# EAGLE board Artemis_Global_Tracker-Panel (EAGLE 9.5.2), part 1 of 5
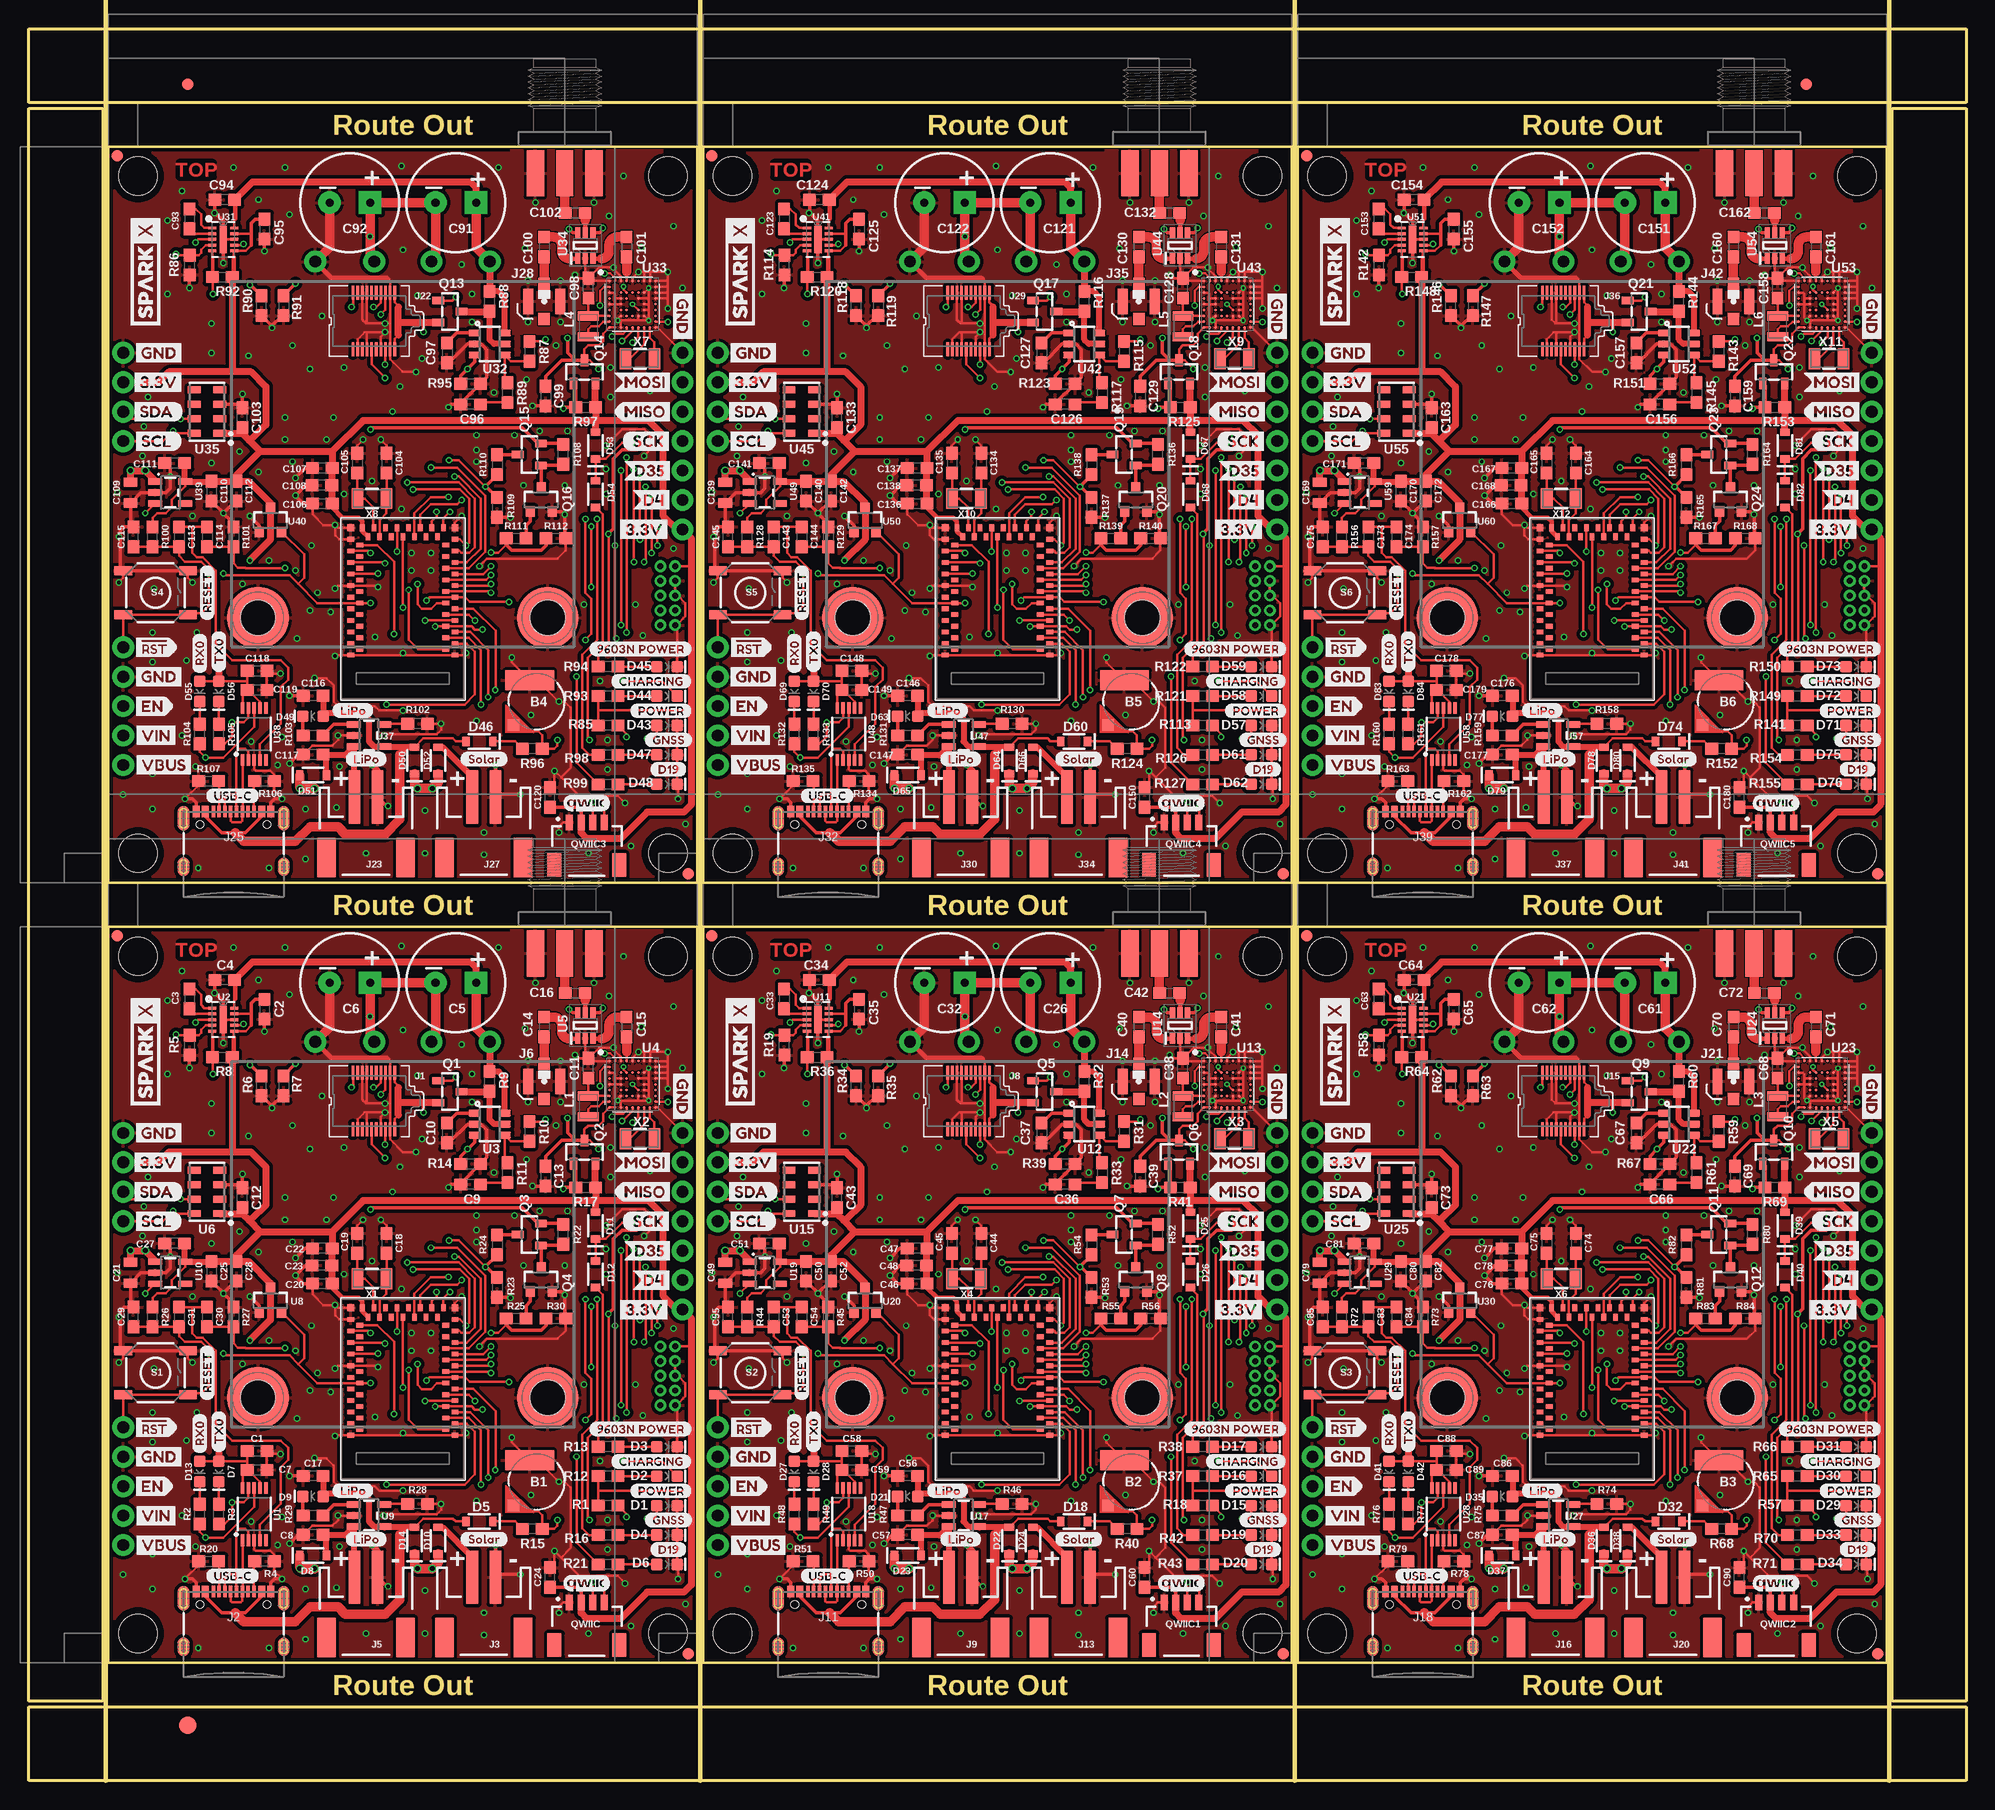
[diagram p0: board, top side]
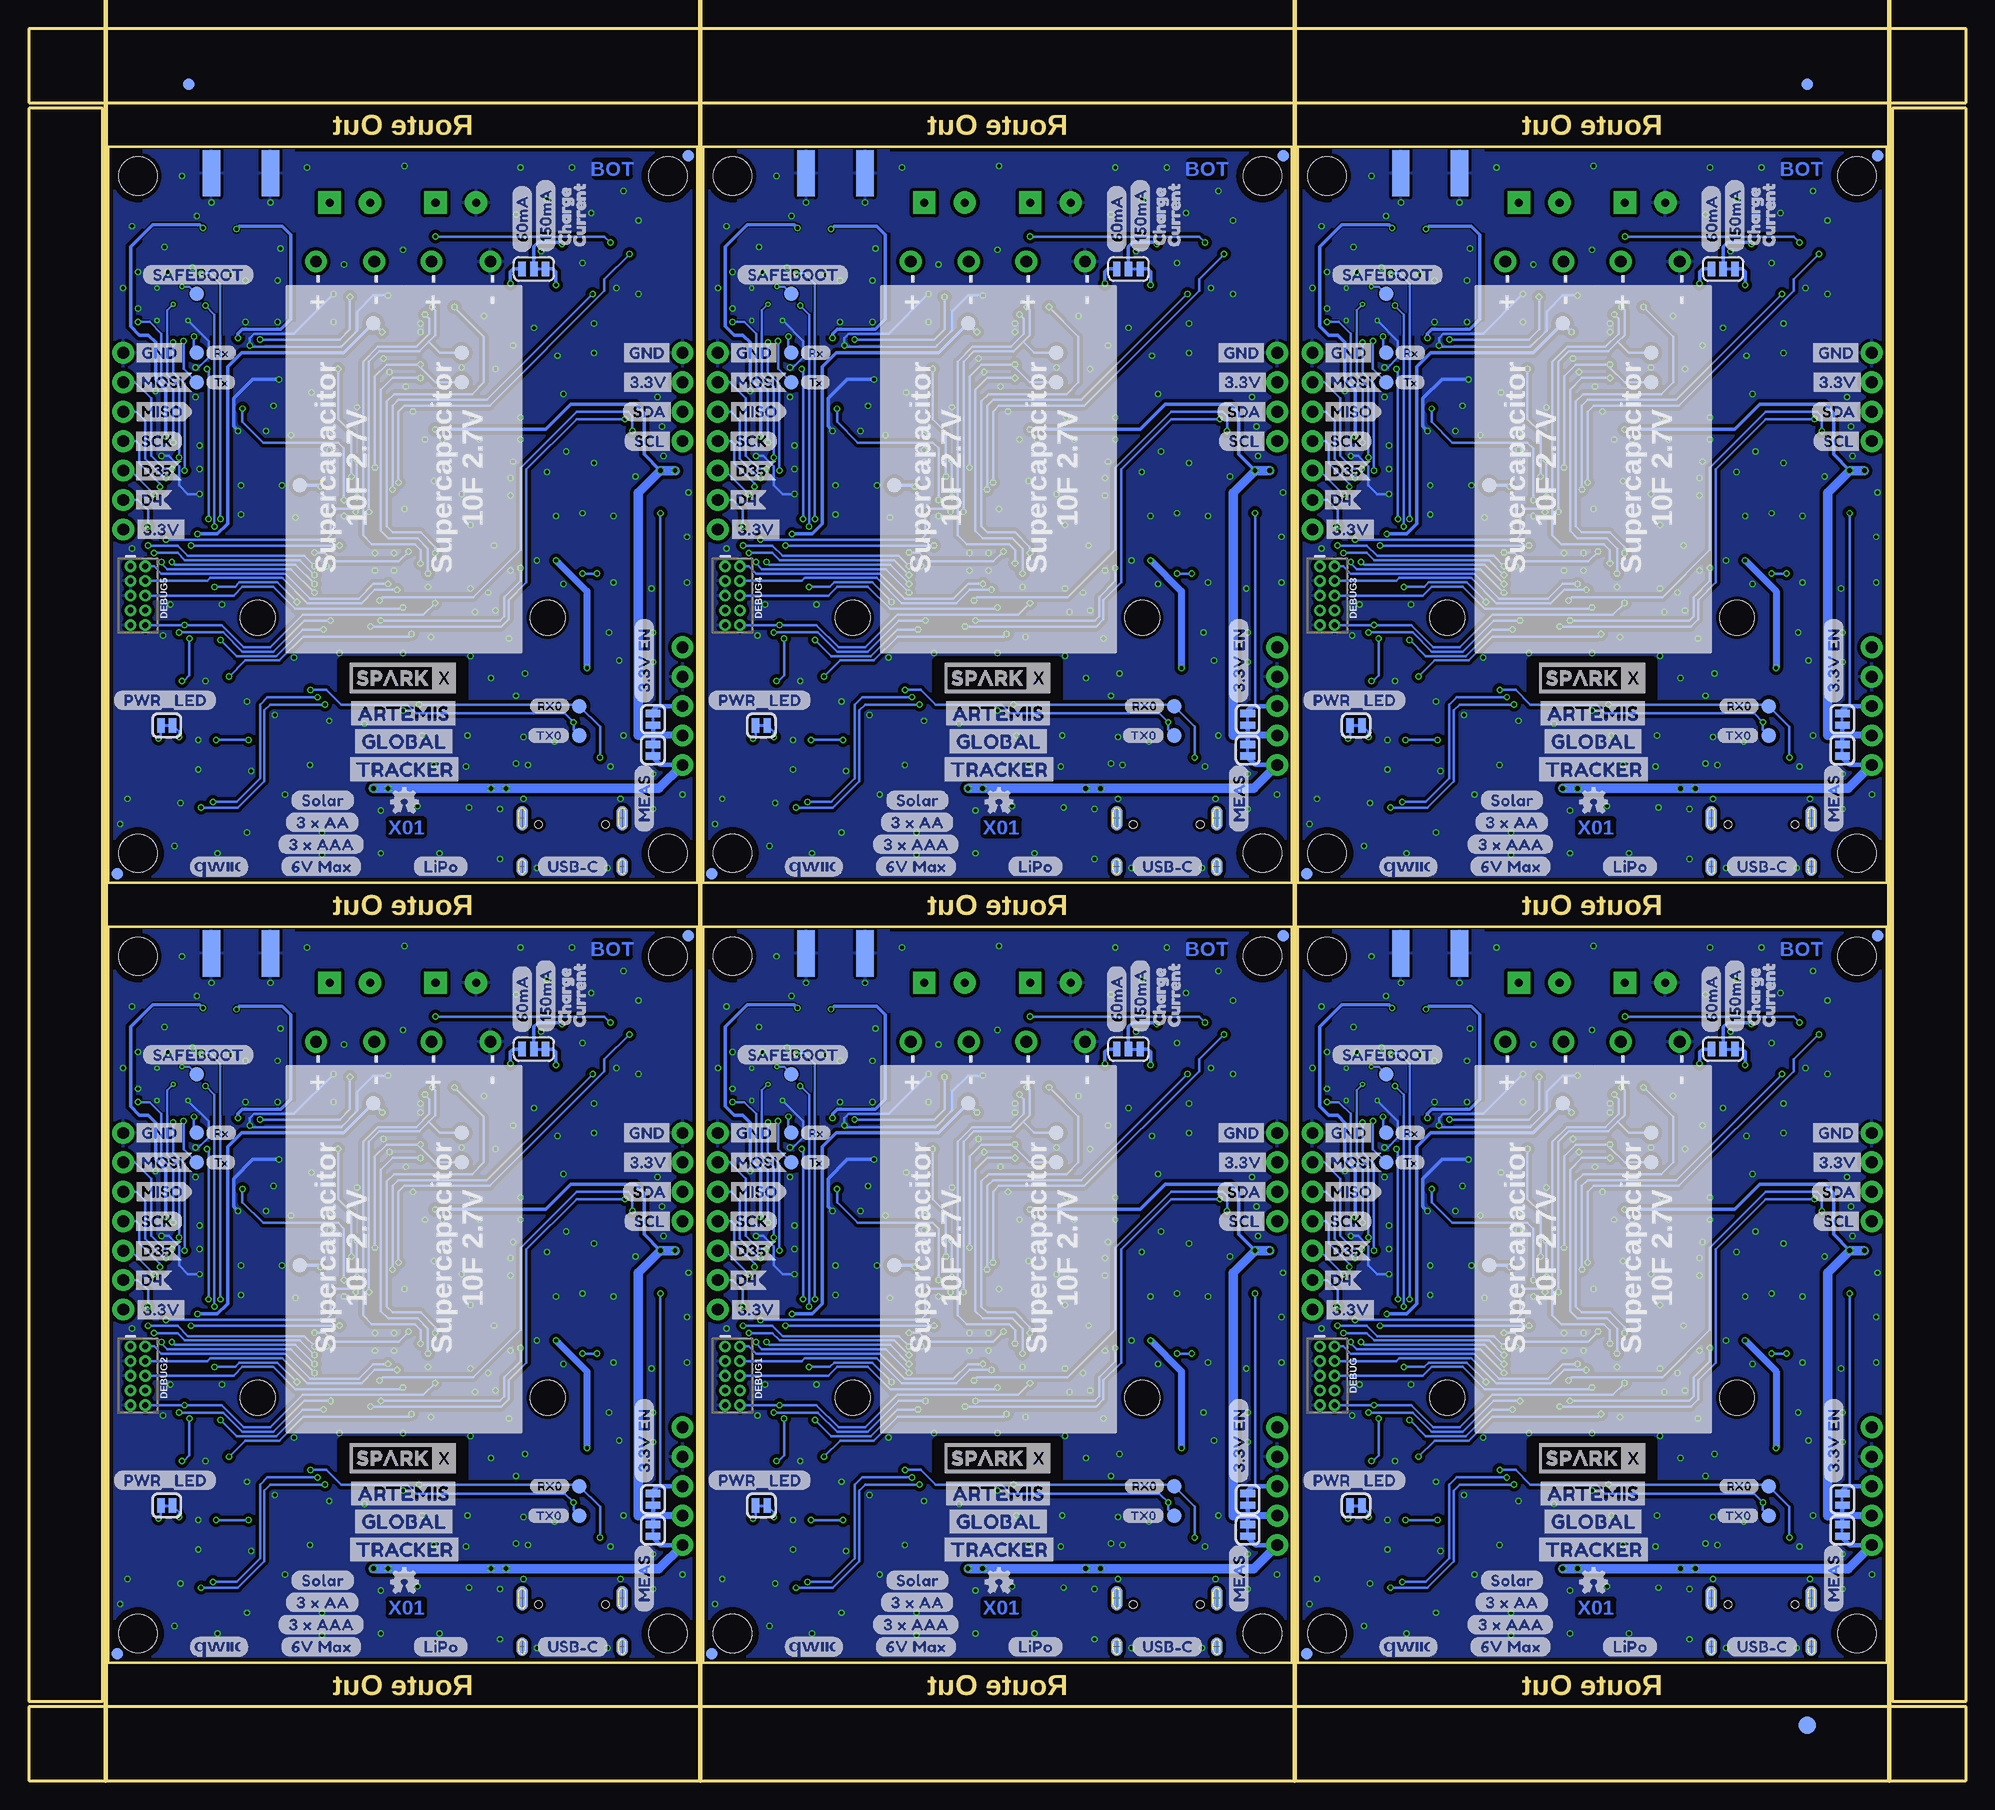
[diagram p1: board, bottom side, seen from below]

Size 167.13 x 151.13 mm. Coordinates in mm from the lower left corner, seen from the top.
Outline: 6.86,10.16 6.86,73.66 57.66,73.66 57.66,10.16 6.86,10.16
Outline: 58.17,10.16 58.17,73.66 108.97,73.66 108.97,10.16 58.17,10.16
Outline: 109.47,10.16 109.47,73.66 160.27,73.66 160.27,10.16 109.47,10.16
Outline: 6.86,77.47 6.86,140.97 57.66,140.97 57.66,77.47 6.86,77.47
Outline: 58.17,77.47 58.17,140.97 108.97,140.97 108.97,77.47 58.17,77.47
Outline: 109.47,77.47 109.47,140.97 160.27,140.97 160.27,77.47 109.47,77.47
Outline: 0,6.35 167.13,6.35 167.13,0 0,0 0,6.35
Outline: 160.78,144.27 167.13,144.27 167.13,6.86 160.78,6.86 160.78,144.27
Outline: 0,151.13 167.13,151.13 167.13,144.78 0,144.78 0,151.13
Outline: 0,144.27 6.35,144.27 6.35,6.86 0,6.86 0,144.27
Copper layers (1*16): Top 0.035mm / dielectric 1.5mm / Bottom 0.035mm
Design rules "Artemis_Global_Tracker": minimum track width 4mil, minimum drill 6mil, track to track 4mil, track to pad 4mil, pad to pad 4mil, via to via 4mil, smd to smd 4mil, copper to edge 4mil, drill to drill 4mil, minimum pad ring 5mil, minimum via ring 5mil, stop-mask expansion 4mil, vias tented up to drill 25mil, thermal gap 10mil
Net classes: 1 3.3V: width 0.203 mm
tRestrict: area 27.1,26.1 to 37.5,29.3; area 78.4,26.1 to 88.8,29.3; area 129.7,26.1 to 140.1,29.3; area 27.1,93.4 to 37.5,96.6; area 78.4,93.4 to 88.8,96.6; area 129.7,93.4 to 140.1,96.6
bRestrict: area 27.1,26.1 to 37.5,29.3; area 78.4,26.1 to 88.8,29.3; area 129.7,26.1 to 140.1,29.3; area 27.1,93.4 to 37.5,96.6; area 78.4,93.4 to 88.8,96.6; area 129.7,93.4 to 140.1,96.6
Milling: 4 lines

## Footprints (pad centres in the part's own frame; a part is rotated, then mirrored left to right if it is on the bottom)
SMT-JUMPER_2_NC_TRACE_SILK = smd 0.635 x 1.27: 1 -0.508,0; 2 0.508,0
PAD.03X.05 = smd 1.27 x 1.27: P$1 0,0
1X01_NO_SILK = drill 1.016 pad 1.88: 1 0,0
ML414H_IV01E = smd 1 x 1: + 2.022,2.032 | smd 4.2 x 1.7: - 0.6,-1.85
0603 = smd 1.1 x 1: 1 -0.85,0; 2 0.85,0
CPOL-RADIAL-1F-2.7V = drill 0.7 pad 1.93 square: + 1.75,0 | drill 0.7 pad 1.93: - -1.75,0
0805 = smd 0.8 x 1.2: 1 -0.9,0; 2 0.9,0
LED-0603 = smd 1 x 1: A -0.877,0; C 0.877,0
SOD-323 = smd 0.63 x 0.83: A 1.15,0; C -1.15,0
2X5-PTH-1.27MM-NO_SILK = drill 0.508 pad 1: 1 -2.54,-0.635; 2 -2.54,0.635; 3 -1.27,-0.635; 4 -1.27,0.635; 5 0,-0.635; 6 0,0.635; 7 1.27,-0.635; 8 1.27,0.635; 9 2.54,-0.635; 10 2.54,0.635
FIDUCIAL-1X2 = smd 1 x 1: 1 0,0
FIDUCIAL-1.5X3 = smd 1.5 x 1.5: 1 0,0
1X04_NO_SILK = drill 1.016 pad 1.88: 1 0,0; 2 2.54,0; 3 5.08,0; 4 7.62,0
IRIDIUM_9603N = smd 0.23 x 1.2: 1 11.8,28.035; 2 11.8,23.165; 3 11.4,28.035; 4 11.4,23.165; 5 11,28.035; 6 11,23.165; 7 10.6,28.035; 8 10.6,23.165; 9 10.2,28.035; 10 10.2,23.165; 11 9.8,28.035; 12 9.8,23.165; 13 9.4,28.035; 14 9.4,23.165; 15 9,28.035; 16 9,23.165; 17 8.6,28.035; 18 8.6,23.165; 19 8.2,28.035; 20 8.2,23.165 | smd 5.3 x 5.3: HOLE1 0,0; HOLE2 25,0 | hole 3: 0,0; 25,0
USB-C-16P = smd 0.3 x 1: A5 -1.25,-0.34; A6 -0.25,-0.34; A7 0.25,-0.34; A8 1.25,-0.34; B5 1.75,-0.34; B6 0.75,-0.34; B7 -0.75,-0.34; B8 -1.75,-0.34 | smd 0.6 x 1: GND -3.225,-0.34; GND2 3.225,-0.34; VBUS1 -2.45,-0.34; VBUS2 2.45,-0.34 | smd 1 x 2.1: SHLD1 -4.32,-0.915; SHLD2 4.32,-0.915 | smd 1 x 2.1 bottom: SHLD3 -4.32,-0.915; SHLD4 4.32,-0.915 | smd 1 x 1.6: SHLD5 -4.32,-5.095; SHLD8 4.32,-5.095 | smd 1 x 1.6 bottom: SHLD6 -4.32,-5.095; SHLD7 4.32,-5.095 | hole 0.65: -2.89,-1.445; 2.89,-1.445
JST-2-SMD = smd 1 x 4.6: 1 -1,-3.7; 2 1,-3.7 | smd 1.6 x 3.4: NC1 -3.4,1.5; NC2 3.4,1.5
1X02_NO_SILK = drill 1.016 pad 1.88: 1 0,0; 2 2.54,0
U.FL = smd 2.2 x 0.85: 1 0,1.375; 2 0,-1.375 | smd 1.05 x 1: FEED 1.525,0; NC -1.525,0
SMA-EDGE = smd 1.5 x 4: GND@0 -2.54,0; GND@1 2.54,0; SIG 0,0 | smd 1.5 x 4 bottom: GND@2 -2.54,0; GND@3 2.54,0
SMT-JUMPER_3_1-NC_TRACE_SILK = smd 0.635 x 1.27: 1 -1.016,0; 2 0,0; 3 1.016,0
STAND-OFF = hole 3.302: 0,0
0806 = smd 0.8 x 1.8: 1 -0.9,0; 2 0.9,0
SOT23-R = smd 0.635 x 1.016: 1 -0.95,-1; 2 0.95,-1; 3 0,1
SOT23-3 = smd 0.8 x 0.9: 1 -0.95,-1; 2 0.95,-1; 3 0,1.1
JST04_1MM_RA = smd 0.6 x 1.35: 1 -1.5,0; 2 -0.5,0; 3 0.5,0; 4 1.5,0 | smd 1.2 x 2: NC1 2.8,-3.675; NC2 -2.8,-3.675
TACTILE_SWITCH_SMD_5.2MM = smd 1.524 x 0.762: 1 -2.794,1.905; 2 2.794,1.905; 3 -2.794,-1.905; 4 2.794,-1.905
1X07_NO_SILK = drill 1.016 pad 1.88: 1 0,0; 2 2.54,0; 3 5.08,0; 4 7.62,0; 5 10.16,0; 6 12.7,0; 7 15.24,0
MSOP10 = smd 1 x 0.3: 1 -2.25,1; 2 -2.25,0.5; 3 -2.25,0; 4 -2.25,-0.5; 5 -2.25,-1; 6 2.25,-1; 7 2.25,-0.5; 8 2.25,0; 9 2.25,0.5; 10 2.25,1
DFN300X200-10L = smd 0.711 x 0.254: 1 -0.94,0.991; 2 -0.94,0.508; 3 -0.94,0; 4 -0.94,-0.508; 5 -0.94,-0.991; 6 0.94,-0.991; 7 0.94,-0.508; 8 0.94,0; 9 0.94,0.508; 10 0.94,0.991 | smd 0.635 x 2.388: 11 0,0
TSOT6 = smd 0.6 x 1.05: 1 -0.95,-1.3; 2 0,-1.3; 3 0.95,-1.3; 4 0.95,1.3; 5 0,1.3; 6 -0.95,1.3
UBLOX_ZOE_M8-0-10 = smd 0.25 x 0.25: 1 -1.996,2.004; 2 -1.496,2.004; 3 -0.996,2.004; 4 -0.496,2.004; 5 0.004,2.004; 6 0.504,2.004; 7 1.004,2.004; 8 1.504,2.004; 9 2.004,2.004; 10 2.004,1.504; 11 2.004,1.004; 12 2.004,0.504; 13 2.004,0.004; 14 2.004,-0.496; 15 2.004,-0.996; 16 2.004,-1.496; 17 2.004,-1.996; 18 1.504,-1.996; 19 1.004,-1.996; 20 0.504,-1.996; 21 0.004,-1.996; 22 -0.496,-1.996; 23 -0.996,-1.996; 24 -1.496,-1.996; 25 -1.996,-1.996; 26 -1.996,-1.496; 27 -1.996,-0.996; 28 -1.996,-0.496; 29 -1.996,0.004; 30 -1.996,0.504; 31 -1.996,1.004; 32 -1.996,1.504; 33 -0.996,1.004; 34 -0.496,1.004; 35 0.004,1.004; 36 0.504,1.004; 37 1.004,1.004; 38 1.004,0.004; 39 1.004,-0.496; 40 1.004,-0.996; 41 0.504,-0.996; 42 0.004,-0.996; 43 -0.496,-0.996; 44 -0.996,-0.996; 45 -0.996,-0.496; 46 -0.996,0.004; 47 -0.996,0.504; 48 -0.496,0.504; 49 0.504,0.504; 50 0.504,-0.496; 51 -0.496,-0.496
SOT65P220X100-6N = smd 0.95 x 0.45: 1 -1.1,0.65; 2 -1.1,0; 3 -1.1,-0.65; 4 1.1,-0.65; 5 1.1,0; 6 1.1,0.65
MS8607-02BA01 = smd 1.1 x 0.6: 1 -1.1,1.875; 2 -1.1,0.625; 3 -1.1,-0.625; 4 -1.1,-1.875; 5 1.1,-1.875; 6 1.1,-0.625; 7 1.1,0.625; 8 1.1,1.875
ARTEMIS_FP = smd 0.4 x 0.6: AD16 -4,-3.7; BOOT 1.5,4.5; D0 0.5,-4.5; D1 -0.5,-4.5; D2 -1,-3.7; D3 2,-3.7; D7 -1.5,4.5; D8 -0.5,4.5; D9 2,3.7; D10 1,3.7; D14 -5,3.7; D17 -3.5,-4.5; D36 2.5,-4.5; D38 3,-3.7; D40 2.5,4.5; D41 -2.5,-4.5; GND@1 4.5,4.5; GND@39 -5.5,-4.5; GND@47 -1.5,-4.5; GND@59 4.5,-4.5; RXI-0 3.5,4.5; SWDCK 4,3.7; SWDIO 0,3.7; TXO-0 0.5,4.5; ~AD31 -3,-3.7; ~AD35 -2,3.7; ~D4 -2.5,4.5; ~D5 -1,3.7; ~D18 -4.5,-4.5; ~D19 -5,-3.7; ~D22 -3.5,4.5; ~D23 -4,3.7; ~D24 -3,3.7; ~D27 -4.5,4.5; ~D28 -5.5,4.5; ~D37 3.5,-4.5; ~D39 3,3.7; ~D42 1.5,-4.5; ~D43 1,-3.7; ~D44 4,-3.7; ~D45 -2,-3.7; ~RST 0,-3.7 | smd 0.6 x 0.4: AD34 -6.5,-0.5; D15 -6.5,0.5; VDD@36 -5.7,-3; VDD@37 -6.5,-3.5; XI -6.5,-2.5; XO -5.7,-2; ~AD11 -5.7,-1; ~AD12 -5.7,2; ~AD13 -5.7,1; ~AD29 -6.5,-1.5; ~AD32 -5.7,3; ~AD33/SWO -5.7,0; ~D6 -6.5,3.5; ~D25 -6.5,2.5; ~D26 -6.5,1.5 | smd 0.6 x 0.6: GND@22 -6.5,4.5; GND@38 -6.5,-4.5
SSOP3 = smd 0.8 x 0.9: 1 -0.95,-1; 2 0.95,-1; 3 0,1.1
SOT23-5 = smd 0.55 x 1.2: 1 -0.95,-1.3; 2 0,-1.3; 3 0.95,-1.3; 4 0.95,1.3; 5 -0.95,1.3
CRYSTAL-SMD-3.2X1.5MM = smd 1 x 1.8: P$1 -1.25,0; P$2 1.25,0

## Placement (x,y rotation side)
3V3EN  JUMPER-SMT_2_NC_TRACE_SILK  [SMT-JUMPER_2_NC_TRACE_SILK]  10.67,24.26 90 bottom
3V3EN1  JUMPER-SMT_2_NC_TRACE_SILK  [SMT-JUMPER_2_NC_TRACE_SILK]  61.98,24.26 90 bottom
3V3EN2  JUMPER-SMT_2_NC_TRACE_SILK  [SMT-JUMPER_2_NC_TRACE_SILK]  113.28,24.26 90 bottom
3V3EN3  JUMPER-SMT_2_NC_TRACE_SILK  [SMT-JUMPER_2_NC_TRACE_SILK]  10.67,91.57 90 bottom
3V3EN4  JUMPER-SMT_2_NC_TRACE_SILK  [SMT-JUMPER_2_NC_TRACE_SILK]  61.98,91.57 90 bottom
3V3EN5  JUMPER-SMT_2_NC_TRACE_SILK  [SMT-JUMPER_2_NC_TRACE_SILK]  113.28,91.57 90 bottom
5V1  TEST-POINT3X5  [PAD.03X.05]  86.11,58.42 0 bottom
5V2  TEST-POINT3X5  [PAD.03X.05]  137.41,58.42 0 bottom
5V3  TEST-POINT3X5  [PAD.03X.05]  34.8,58.42 0 bottom
5V4  TEST-POINT3X5  [PAD.03X.05]  34.8,125.73 0 bottom
5V5  TEST-POINT3X5  [PAD.03X.05]  86.11,125.73 0 bottom
5V6  TEST-POINT3X5  [PAD.03X.05]  137.41,125.73 0 bottom
!RESET  [1X01_NO_SILK]  8.13,30.48 0 top
!RESET1  [1X01_NO_SILK]  59.44,30.48 0 top
!RESET2  [1X01_NO_SILK]  110.74,30.48 0 top
!RESET3  [1X01_NO_SILK]  8.13,97.79 0 top
!RESET4  [1X01_NO_SILK]  59.44,97.79 0 top
!RESET5  [1X01_NO_SILK]  110.74,97.79 0 top
B1  ML414H_IV01E_BATTERY  [ML414H_IV01E]  43.81,25.78 180 top
B2  ML414H_IV01E_BATTERY  [ML414H_IV01E]  95.12,25.78 180 top
B3  ML414H_IV01E_BATTERY  [ML414H_IV01E]  146.43,25.78 180 top
B4  ML414H_IV01E_BATTERY  [ML414H_IV01E]  43.81,93.09 180 top
B5  ML414H_IV01E_BATTERY  [ML414H_IV01E]  95.12,93.09 180 top
B6  ML414H_IV01E_BATTERY  [ML414H_IV01E]  146.43,93.09 180 top
C1  10nF  [0603]  19.68,28.45 0 top
C2  2.2uF  [0603]  20.32,66.55 270 top
C3  1.0uF  [0603]  13.84,67.44 270 top
C4  0.22uF  [0603]  16.89,69.09 180 top
C5  1F 2.7V  [CPOL-RADIAL-1F-2.7V]  36.83,68.83 0 top
C6  1F 2.7V  [CPOL-RADIAL-1F-2.7V]  27.69,68.83 0 top
C7  0.1uF  [0603]  19.68,26.8 0 top
C8  4.7uF  [0603]  24.51,21.21 180 top
C9  10nF  [0603]  38.1,51.44 180 top
C10  1.0uF  [0603]  36.07,55.88 270 top
C11  4.7uF  [0603]  48.26,61.47 90 top
C12  0.22uF  [0603]  18.41,50.29 90 top
C13  0.1uF  [0603]  44.58,52.15 270 top
C14  100pF  [0603]  44.45,65.02 270 top
C15  100pF  [0603]  51.56,65.02 270 top
C16  100pF  [0603]  47.12,67.94 0 top
C17  4.7uF  [0603]  24.51,26.29 180 top
C18  15pF  [0603]  30.86,46.36 270 top
C19  15pF  [0603]  28.32,46.36 270 top
C20  0.1uF  [0603]  25.32,42.88 0 top
C21  22uF  [0805]  8.76,43.81 270 top
C22  10uF  [0603]  25.32,45.92 180 top
C23  1.0uF  [0603]  25.27,44.45 180 top
C24  1.0uF  [0603]  44.96,17.53 90 top
C25  22uF  [0603]  15.75,43.94 270 top
C26  1F 2.7V  [CPOL-RADIAL-1F-2.7V]  88.14,68.83 0 top
C27  1.0uF  [0603]  12.57,46.36 180 top
C28  0.1uF  [0603]  17.91,43.94 270 top
C29  1nF  [0603]  9.02,40 90 top
C30  0.1uF  [0603]  15.37,40 270 top
C31  0.1uF  [0603]  12.95,40 270 top
C32  1F 2.7V  [CPOL-RADIAL-1F-2.7V]  78.99,68.83 0 top
C33  1.0uF  [0603]  65.15,67.44 270 top
C34  0.22uF  [0603]  68.2,69.09 180 top
C35  2.2uF  [0603]  71.63,66.55 270 top
C36  10nF  [0603]  89.41,51.44 180 top
C37  1.0uF  [0603]  87.38,55.88 270 top
C38  4.7uF  [0603]  99.57,61.47 90 top
C39  0.1uF  [0603]  95.89,52.15 270 top
C40  100pF  [0603]  95.76,65.02 270 top
C41  100pF  [0603]  102.87,65.02 270 top
C42  100pF  [0603]  98.42,67.94 0 top
C43  0.22uF  [0603]  69.72,50.29 90 top
C44  15pF  [0603]  82.17,46.36 270 top
C45  15pF  [0603]  79.63,46.36 270 top
C46  0.1uF  [0603]  76.63,42.88 0 top
C47  10uF  [0603]  76.63,45.92 180 top
C48  1.0uF  [0603]  76.58,44.45 180 top
C49  22uF  [0805]  60.07,43.81 270 top
C50  22uF  [0603]  67.06,43.94 270 top
C51  1.0uF  [0603]  63.88,46.36 180 top
C52  0.1uF  [0603]  69.22,43.94 270 top
C53  0.1uF  [0603]  64.26,40 270 top
C54  0.1uF  [0603]  66.67,40 270 top
C55  1nF  [0603]  60.32,40 90 top
C56  4.7uF  [0603]  75.82,26.29 180 top
C57  4.7uF  [0603]  75.82,21.21 180 top
C58  10nF  [0603]  70.99,28.45 0 top
C59  0.1uF  [0603]  70.99,26.8 0 top
C60  1.0uF  [0603]  96.27,17.53 90 top
C61  1F 2.7V  [CPOL-RADIAL-1F-2.7V]  139.45,68.83 0 top
C62  1F 2.7V  [CPOL-RADIAL-1F-2.7V]  130.3,68.83 0 top
C63  1.0uF  [0603]  116.46,67.44 270 top
C64  0.22uF  [0603]  119.51,69.09 180 top
C65  2.2uF  [0603]  122.94,66.55 270 top
C66  10nF  [0603]  140.72,51.44 180 top
C67  1.0uF  [0603]  138.68,55.88 270 top
C68  4.7uF  [0603]  150.88,61.47 90 top
C69  0.1uF  [0603]  147.19,52.15 270 top
C70  100pF  [0603]  147.07,65.02 270 top
C71  100pF  [0603]  154.18,65.02 270 top
C72  100pF  [0603]  149.73,67.94 0 top
C73  0.22uF  [0603]  121.03,50.29 90 top
C74  15pF  [0603]  133.48,46.36 270 top
C75  15pF  [0603]  130.94,46.36 270 top
C76  0.1uF  [0603]  127.94,42.88 0 top
C77  10uF  [0603]  127.94,45.92 180 top
C78  1.0uF  [0603]  127.89,44.45 180 top
C79  22uF  [0805]  111.38,43.81 270 top
C80  22uF  [0603]  118.36,43.94 270 top
C81  1.0uF  [0603]  115.19,46.36 180 top
C82  0.1uF  [0603]  120.52,43.94 270 top
C83  0.1uF  [0603]  115.57,40 270 top
C84  0.1uF  [0603]  117.98,40 270 top
C85  1nF  [0603]  111.63,40 90 top
C86  4.7uF  [0603]  127.13,26.29 180 top
C87  4.7uF  [0603]  127.13,21.21 180 top
C88  10nF  [0603]  122.3,28.45 0 top
C89  0.1uF  [0603]  122.3,26.8 0 top
C90  1.0uF  [0603]  147.57,17.53 90 top
C91  1F 2.7V  [CPOL-RADIAL-1F-2.7V]  36.83,136.14 0 top
C92  1F 2.7V  [CPOL-RADIAL-1F-2.7V]  27.69,136.14 0 top
C93  1.0uF  [0603]  13.84,134.75 270 top
C94  0.22uF  [0603]  16.89,136.4 180 top
C95  2.2uF  [0603]  20.32,133.86 270 top
C96  10nF  [0603]  38.1,118.74 180 top
C97  1.0uF  [0603]  36.07,123.19 270 top
C98  4.7uF  [0603]  48.26,128.78 90 top
C99  0.1uF  [0603]  44.58,119.46 270 top
C100  100pF  [0603]  44.45,132.33 270 top
C101  100pF  [0603]  51.56,132.33 270 top
C102  100pF  [0603]  47.12,135.25 0 top
C103  0.22uF  [0603]  18.41,117.6 90 top
C104  15pF  [0603]  30.86,113.66 270 top
C105  15pF  [0603]  28.32,113.66 270 top
C106  0.1uF  [0603]  25.32,110.19 0 top
C107  10uF  [0603]  25.32,113.23 180 top
C108  1.0uF  [0603]  25.27,111.76 180 top
C109  22uF  [0805]  8.76,111.12 270 top
C110  22uF  [0603]  15.75,111.25 270 top
C111  1.0uF  [0603]  12.57,113.66 180 top
C112  0.1uF  [0603]  17.91,111.25 270 top
C113  0.1uF  [0603]  12.95,107.31 270 top
C114  0.1uF  [0603]  15.37,107.31 270 top
C115  1nF  [0603]  9.02,107.31 90 top
C116  4.7uF  [0603]  24.51,93.6 180 top
C117  4.7uF  [0603]  24.51,88.52 180 top
C118  10nF  [0603]  19.68,95.76 0 top
C119  0.1uF  [0603]  19.68,94.11 0 top
C120  1.0uF  [0603]  44.96,84.84 90 top
C121  1F 2.7V  [CPOL-RADIAL-1F-2.7V]  88.14,136.14 0 top
C122  1F 2.7V  [CPOL-RADIAL-1F-2.7V]  78.99,136.14 0 top
C123  1.0uF  [0603]  65.15,134.75 270 top
C124  0.22uF  [0603]  68.2,136.4 180 top
C125  2.2uF  [0603]  71.63,133.86 270 top
C126  10nF  [0603]  89.41,118.74 180 top
C127  1.0uF  [0603]  87.38,123.19 270 top
C128  4.7uF  [0603]  99.57,128.78 90 top
C129  0.1uF  [0603]  95.89,119.46 270 top
C130  100pF  [0603]  95.76,132.33 270 top
C131  100pF  [0603]  102.87,132.33 270 top
C132  100pF  [0603]  98.42,135.25 0 top
C133  0.22uF  [0603]  69.72,117.6 90 top
C134  15pF  [0603]  82.17,113.66 270 top
C135  15pF  [0603]  79.63,113.66 270 top
C136  0.1uF  [0603]  76.63,110.19 0 top
C137  10uF  [0603]  76.63,113.23 180 top
C138  1.0uF  [0603]  76.58,111.76 180 top
C139  22uF  [0805]  60.07,111.12 270 top
C140  22uF  [0603]  67.06,111.25 270 top
C141  1.0uF  [0603]  63.88,113.66 180 top
C142  0.1uF  [0603]  69.22,111.25 270 top
C143  0.1uF  [0603]  64.26,107.31 270 top
C144  0.1uF  [0603]  66.67,107.31 270 top
C145  1nF  [0603]  60.32,107.31 90 top
C146  4.7uF  [0603]  75.82,93.6 180 top
C147  4.7uF  [0603]  75.82,88.52 180 top
C148  10nF  [0603]  70.99,95.76 0 top
C149  0.1uF  [0603]  70.99,94.11 0 top
C150  1.0uF  [0603]  96.27,84.84 90 top
C151  1F 2.7V  [CPOL-RADIAL-1F-2.7V]  139.45,136.14 0 top
C152  1F 2.7V  [CPOL-RADIAL-1F-2.7V]  130.3,136.14 0 top
C153  1.0uF  [0603]  116.46,134.75 270 top
C154  0.22uF  [0603]  119.51,136.4 180 top
C155  2.2uF  [0603]  122.94,133.86 270 top
C156  10nF  [0603]  140.72,118.74 180 top
C157  1.0uF  [0603]  138.68,123.19 270 top
C158  4.7uF  [0603]  150.88,128.78 90 top
C159  0.1uF  [0603]  147.19,119.46 270 top
C160  100pF  [0603]  147.07,132.33 270 top
C161  100pF  [0603]  154.18,132.33 270 top
C162  100pF  [0603]  149.73,135.25 0 top
C163  0.22uF  [0603]  121.03,117.6 90 top
C164  15pF  [0603]  133.48,113.66 270 top
C165  15pF  [0603]  130.94,113.66 270 top
C166  0.1uF  [0603]  127.94,110.19 0 top
C167  10uF  [0603]  127.94,113.23 180 top
C168  1.0uF  [0603]  127.89,111.76 180 top
C169  22uF  [0805]  111.38,111.12 270 top
C170  22uF  [0603]  118.36,111.25 270 top
C171  1.0uF  [0603]  115.19,113.66 180 top
C172  0.1uF  [0603]  120.52,111.25 270 top
C173  0.1uF  [0603]  115.57,107.31 270 top
C174  0.1uF  [0603]  117.98,107.31 270 top
C175  1nF  [0603]  111.63,107.31 90 top
C176  4.7uF  [0603]  127.13,93.6 180 top
C177  4.7uF  [0603]  127.13,88.52 180 top
C178  10nF  [0603]  122.3,95.76 0 top
C179  0.1uF  [0603]  122.3,94.11 0 top
C180  1.0uF  [0603]  147.57,84.84 90 top
D1  GREEN  [LED-0603]  55.04,23.72 0 top
D2  Yellow  [LED-0603]  55.04,26.26 0 top
D3  RED  [LED-0603]  55.04,28.8 0 top
D4  BLUE  [LED-0603]  55.04,21.18 0 top
D5  0.5A/40V/420mV  [SOD-323]  38.86,22.35 180 top
D6  WHITE  [LED-0603]  55.04,18.64 0 top
D7  GREEN  [LED-0603]  16.38,26.67 270 top
D8  0.5A/40V/420mV  [SOD-323]  24.51,19.43 0 top
D9  Yellow  [LED-0603]  24.51,24.51 180 top
D10  0.5A/40V/420mV  [SOD-323]  35.31,20.7 90 top
D11  0.5A/40V/420mV  [SOD-323]  48.89,47.88 90 top
D12  0.5A/40V/420mV  [SOD-323]  48.89,43.69 270 top
D13  Yellow  [LED-0603]  14.73,26.67 270 top
D14  0.5A/40V/420mV  [SOD-323]  33.27,20.7 90 top
D15  GREEN  [LED-0603]  106.35,23.72 0 top
D16  Yellow  [LED-0603]  106.35,26.26 0 top
D17  RED  [LED-0603]  106.35,28.8 0 top
D18  0.5A/40V/420mV  [SOD-323]  90.17,22.35 180 top
D19  BLUE  [LED-0603]  106.35,21.18 0 top
D20  WHITE  [LED-0603]  106.35,18.64 0 top
D21  Yellow  [LED-0603]  75.82,24.51 180 top
D22  0.5A/40V/420mV  [SOD-323]  84.58,20.7 90 top
D23  0.5A/40V/420mV  [SOD-323]  75.82,19.43 0 top
D24  0.5A/40V/420mV  [SOD-323]  86.61,20.7 90 top
D25  0.5A/40V/420mV  [SOD-323]  100.2,47.88 90 top
D26  0.5A/40V/420mV  [SOD-323]  100.2,43.69 270 top
D27  Yellow  [LED-0603]  66.04,26.67 270 top
D28  GREEN  [LED-0603]  67.69,26.67 270 top
D29  GREEN  [LED-0603]  157.66,23.72 0 top
D30  Yellow  [LED-0603]  157.66,26.26 0 top
D31  RED  [LED-0603]  157.66,28.8 0 top
D32  0.5A/40V/420mV  [SOD-323]  141.48,22.35 180 top
D33  BLUE  [LED-0603]  157.66,21.18 0 top
D34  WHITE  [LED-0603]  157.66,18.64 0 top
D35  Yellow  [LED-0603]  127.13,24.51 180 top
D36  0.5A/40V/420mV  [SOD-323]  135.89,20.7 90 top
D37  0.5A/40V/420mV  [SOD-323]  127.13,19.43 0 top
D38  0.5A/40V/420mV  [SOD-323]  137.92,20.7 90 top
D39  0.5A/40V/420mV  [SOD-323]  151.51,47.88 90 top
D40  0.5A/40V/420mV  [SOD-323]  151.51,43.69 270 top
D41  Yellow  [LED-0603]  117.35,26.67 270 top
D42  GREEN  [LED-0603]  119,26.67 270 top
D43  GREEN  [LED-0603]  55.04,91.03 0 top
D44  Yellow  [LED-0603]  55.04,93.57 0 top
D45  RED  [LED-0603]  55.04,96.11 0 top
D46  0.5A/40V/420mV  [SOD-323]  38.86,89.66 180 top
D47  BLUE  [LED-0603]  55.04,88.49 0 top
D48  WHITE  [LED-0603]  55.04,85.95 0 top
D49  Yellow  [LED-0603]  24.51,91.82 180 top
D50  0.5A/40V/420mV  [SOD-323]  33.27,88.01 90 top
D51  0.5A/40V/420mV  [SOD-323]  24.51,86.74 0 top
D52  0.5A/40V/420mV  [SOD-323]  35.31,88.01 90 top
D53  0.5A/40V/420mV  [SOD-323]  48.89,115.19 90 top
D54  0.5A/40V/420mV  [SOD-323]  48.89,111 270 top
D55  Yellow  [LED-0603]  14.73,93.98 270 top
D56  GREEN  [LED-0603]  16.38,93.98 270 top
D57  GREEN  [LED-0603]  106.35,91.03 0 top
D58  Yellow  [LED-0603]  106.35,93.57 0 top
D59  RED  [LED-0603]  106.35,96.11 0 top
D60  0.5A/40V/420mV  [SOD-323]  90.17,89.66 180 top
D61  BLUE  [LED-0603]  106.35,88.49 0 top
D62  WHITE  [LED-0603]  106.35,85.95 0 top
D63  Yellow  [LED-0603]  75.82,91.82 180 top
D64  0.5A/40V/420mV  [SOD-323]  84.58,88.01 90 top
D65  0.5A/40V/420mV  [SOD-323]  75.82,86.74 0 top
D66  0.5A/40V/420mV  [SOD-323]  86.61,88.01 90 top
D67  0.5A/40V/420mV  [SOD-323]  100.2,115.19 90 top
D68  0.5A/40V/420mV  [SOD-323]  100.2,111 270 top
D69  Yellow  [LED-0603]  66.04,93.98 270 top
D70  GREEN  [LED-0603]  67.69,93.98 270 top
D71  GREEN  [LED-0603]  157.66,91.03 0 top
D72  Yellow  [LED-0603]  157.66,93.57 0 top
D73  RED  [LED-0603]  157.66,96.11 0 top
D74  0.5A/40V/420mV  [SOD-323]  141.48,89.66 180 top
D75  BLUE  [LED-0603]  157.66,88.49 0 top
D76  WHITE  [LED-0603]  157.66,85.95 0 top
D77  Yellow  [LED-0603]  127.13,91.82 180 top
D78  0.5A/40V/420mV  [SOD-323]  135.89,88.01 90 top
D79  0.5A/40V/420mV  [SOD-323]  127.13,86.74 0 top
D80  0.5A/40V/420mV  [SOD-323]  137.92,88.01 90 top
D81  0.5A/40V/420mV  [SOD-323]  151.51,115.19 90 top
D82  0.5A/40V/420mV  [SOD-323]  151.51,111 270 top
D83  Yellow  [LED-0603]  117.35,93.98 270 top
D84  GREEN  [LED-0603]  119,93.98 270 top
DEBUG  CORTEX_DEBUG  [2X5-PTH-1.27MM-NO_SILK]  55.12,34.92 270 bottom
DEBUG1  CORTEX_DEBUG  [2X5-PTH-1.27MM-NO_SILK]  106.43,34.92 270 bottom
DEBUG2  CORTEX_DEBUG  [2X5-PTH-1.27MM-NO_SILK]  157.73,34.92 270 bottom
DEBUG3  CORTEX_DEBUG  [2X5-PTH-1.27MM-NO_SILK]  55.12,102.23 270 bottom
DEBUG4  CORTEX_DEBUG  [2X5-PTH-1.27MM-NO_SILK]  106.43,102.23 270 bottom
DEBUG5  CORTEX_DEBUG  [2X5-PTH-1.27MM-NO_SILK]  157.73,102.23 270 bottom
E$1  [FIDUCIAL-1X2]  13.72,146.37 0 top
E$2  [FIDUCIAL-1X2]  13.72,146.37 0 bottom
E$3  [FIDUCIAL-1X2]  153.35,146.37 0 top
E$4  [FIDUCIAL-1X2]  153.35,146.37 0 bottom
E$5  [FIDUCIAL-1.5X3]  13.72,4.76 0 top
E$6  [FIDUCIAL-1.5X3]  13.72,4.76 0 bottom
EN  [1X01_NO_SILK]  8.13,25.4 0 top
EN1  [1X01_NO_SILK]  59.44,25.4 0 top
EN2  [1X01_NO_SILK]  110.74,25.4 0 top
EN3  [1X01_NO_SILK]  8.13,92.71 0 top
EN4  [1X01_NO_SILK]  59.44,92.71 0 top
EN5  [1X01_NO_SILK]  110.74,92.71 0 top
GND  [1X01_NO_SILK]  8.13,27.94 0 top
GND1  [1X01_NO_SILK]  59.44,27.94 0 top
GND2  [1X01_NO_SILK]  110.74,27.94 0 top
GND3  [1X01_NO_SILK]  8.13,95.25 0 top
GND4  [1X01_NO_SILK]  59.44,95.25 0 top
GND5  [1X01_NO_SILK]  110.74,95.25 0 top
GPS_RX  TEST-POINT3X5  [PAD.03X.05]  50.04,55.88 0 bottom
GPS_RX1  TEST-POINT3X5  [PAD.03X.05]  101.35,55.88 0 bottom
GPS_RX2  TEST-POINT3X5  [PAD.03X.05]  152.65,55.88 0 bottom
GPS_RX3  TEST-POINT3X5  [PAD.03X.05]  50.04,123.19 0 bottom
GPS_RX4  TEST-POINT3X5  [PAD.03X.05]  101.35,123.19 0 bottom
GPS_RX5  TEST-POINT3X5  [PAD.03X.05]  152.65,123.19 0 bottom
GPS_TX  TEST-POINT3X5  [PAD.03X.05]  50.04,53.34 0 bottom
GPS_TX1  TEST-POINT3X5  [PAD.03X.05]  101.35,53.34 0 bottom
GPS_TX2  TEST-POINT3X5  [PAD.03X.05]  152.65,53.34 0 bottom
GPS_TX3  TEST-POINT3X5  [PAD.03X.05]  50.04,120.65 0 bottom
GPS_TX4  TEST-POINT3X5  [PAD.03X.05]  101.35,120.65 0 bottom
GPS_TX5  TEST-POINT3X5  [PAD.03X.05]  152.65,120.65 0 bottom
I2C  PTH  [1X04_NO_SILK]  8.13,55.88 270 top
I2C1  PTH  [1X04_NO_SILK]  59.44,55.88 270 top
I2C2  PTH  [1X04_NO_SILK]  110.74,55.88 270 top
I2C3  PTH  [1X04_NO_SILK]  8.13,123.19 270 top
I2C4  PTH  [1X04_NO_SILK]  59.44,123.19 270 top
I2C5  PTH  [1X04_NO_SILK]  110.74,123.19 270 top
J1  IRIDIUM_9603N  [IRIDIUM_9603N]  19.76,33.02 0 top
J2  USB-C  [USB-C-16P]  17.65,16.64 0 top
J3  [JST-2-SMD]  39.24,13.84 180 top
J4  [1X02_NO_SILK]  8.13,22.86 270 top
J5  [JST-2-SMD]  29.08,13.84 180 top
J6  U.FL  [U.FL]  44.45,60.33 90 top
J7  ANTENNA-GROUNDEDEDGE_SMA  [SMA-EDGE]  46.23,71.37 0 top
J8  IRIDIUM_9603N  [IRIDIUM_9603N]  71.07,33.02 0 top
J9  [JST-2-SMD]  80.39,13.84 180 top
J10  [1X02_NO_SILK]  59.44,22.86 270 top
J11  USB-C  [USB-C-16P]  68.96,16.64 0 top
J12  ANTENNA-GROUNDEDEDGE_SMA  [SMA-EDGE]  97.54,71.37 0 top
J13  [JST-2-SMD]  90.55,13.84 180 top
J14  U.FL  [U.FL]  95.76,60.33 90 top
J15  IRIDIUM_9603N  [IRIDIUM_9603N]  122.38,33.02 0 top
J16  [JST-2-SMD]  131.7,13.84 180 top
J17  [1X02_NO_SILK]  110.74,22.86 270 top
J18  USB-C  [USB-C-16P]  120.27,16.64 0 top
J19  ANTENNA-GROUNDEDEDGE_SMA  [SMA-EDGE]  148.84,71.37 0 top
J20  [JST-2-SMD]  141.86,13.84 180 top
J21  U.FL  [U.FL]  147.07,60.33 90 top
J22  IRIDIUM_9603N  [IRIDIUM_9603N]  19.76,100.33 0 top
J23  [JST-2-SMD]  29.08,81.15 180 top
J24  [1X02_NO_SILK]  8.13,90.17 270 top
J25  USB-C  [USB-C-16P]  17.65,83.95 0 top
J26  ANTENNA-GROUNDEDEDGE_SMA  [SMA-EDGE]  46.23,138.68 0 top
J27  [JST-2-SMD]  39.24,81.15 180 top
J28  U.FL  [U.FL]  44.45,127.63 90 top
J29  IRIDIUM_9603N  [IRIDIUM_9603N]  71.07,100.33 0 top
J30  [JST-2-SMD]  80.39,81.15 180 top
J31  [1X02_NO_SILK]  59.44,90.17 270 top
J32  USB-C  [USB-C-16P]  68.96,83.95 0 top
J33  ANTENNA-GROUNDEDEDGE_SMA  [SMA-EDGE]  97.54,138.68 0 top
J34  [JST-2-SMD]  90.55,81.15 180 top
J35  U.FL  [U.FL]  95.76,127.63 90 top
J36  IRIDIUM_9603N  [IRIDIUM_9603N]  122.38,100.33 0 top
J37  [JST-2-SMD]  131.7,81.15 180 top
J38  [1X02_NO_SILK]  110.74,90.17 270 top
J39  USB-C  [USB-C-16P]  120.27,83.95 0 top
J40  ANTENNA-GROUNDEDEDGE_SMA  [SMA-EDGE]  148.84,138.68 0 top
J41  [JST-2-SMD]  141.86,81.15 180 top
J42  U.FL  [U.FL]  147.07,127.63 90 top
JP1  JUMPER-SMT_3_1-NC_TRACE_SILK  [SMT-JUMPER_3_1-NC_TRACE_SILK]  20.95,63.12 0 bottom
JP2  JUMPER-SMT_2_NC_TRACE_SILK  [SMT-JUMPER_2_NC_TRACE_SILK]  52.63,23.72 0 bottom
JP3  FIDUCIAL1X2  [FIDUCIAL-1X2]  108.2,10.92 0 top
JP4  FIDUCIAL1X2  [FIDUCIAL-1X2]  58.93,72.9 0 top
JP5  FIDUCIAL1X2  [FIDUCIAL-1X2]  58.93,72.9 0 bottom
JP6  FIDUCIAL1X2  [FIDUCIAL-1X2]  108.2,10.92 0 bottom
JP7  FIDUCIAL1X2  [FIDUCIAL-1X2]  7.62,72.9 0 bottom
JP8  FIDUCIAL1X2  [FIDUCIAL-1X2]  56.9,10.92 0 top
JP9  STAND-OFF  [STAND-OFF]  9.4,71.12 0 top
JP10  STAND-OFF  [STAND-OFF]  55.12,71.12 0 top
JP11  STAND-OFF  [STAND-OFF]  9.4,12.7 0 top
JP12  STAND-OFF  [STAND-OFF]  55.12,12.7 0 top
JP13  FIDUCIAL1X2  [FIDUCIAL-1X2]  56.9,10.92 0 bottom
JP14  FIDUCIAL1X2  [FIDUCIAL-1X2]  7.62,72.9 0 top
JP15  JUMPER-SMT_3_1-NC_TRACE_SILK  [SMT-JUMPER_3_1-NC_TRACE_SILK]  72.26,63.12 0 bottom
JP16  JUMPER-SMT_2_NC_TRACE_SILK  [SMT-JUMPER_2_NC_TRACE_SILK]  103.94,23.72 0 bottom
JP17  STAND-OFF  [STAND-OFF]  60.71,12.7 0 top
JP18  STAND-OFF  [STAND-OFF]  106.43,12.7 0 top
JP19  STAND-OFF  [STAND-OFF]  106.43,71.12 0 top
JP20  STAND-OFF  [STAND-OFF]  60.71,71.12 0 top
JP21  FIDUCIAL1X2  [FIDUCIAL-1X2]  159.51,10.92 0 top
JP22  FIDUCIAL1X2  [FIDUCIAL-1X2]  110.24,72.9 0 top
JP23  FIDUCIAL1X2  [FIDUCIAL-1X2]  110.24,72.9 0 bottom
JP24  FIDUCIAL1X2  [FIDUCIAL-1X2]  159.51,10.92 0 bottom
JP25  JUMPER-SMT_3_1-NC_TRACE_SILK  [SMT-JUMPER_3_1-NC_TRACE_SILK]  123.57,63.12 0 bottom
JP26  JUMPER-SMT_2_NC_TRACE_SILK  [SMT-JUMPER_2_NC_TRACE_SILK]  155.24,23.72 0 bottom
JP27  STAND-OFF  [STAND-OFF]  112.01,12.7 0 top
JP28  STAND-OFF  [STAND-OFF]  157.73,12.7 0 top
JP29  STAND-OFF  [STAND-OFF]  157.73,71.12 0 top
JP30  STAND-OFF  [STAND-OFF]  112.01,71.12 0 top
JP31  FIDUCIAL1X2  [FIDUCIAL-1X2]  56.9,78.23 0 top
JP32  FIDUCIAL1X2  [FIDUCIAL-1X2]  7.62,140.21 0 top
JP33  FIDUCIAL1X2  [FIDUCIAL-1X2]  7.62,140.21 0 bottom
JP34  FIDUCIAL1X2  [FIDUCIAL-1X2]  56.9,78.23 0 bottom
JP35  JUMPER-SMT_3_1-NC_TRACE_SILK  [SMT-JUMPER_3_1-NC_TRACE_SILK]  20.95,130.43 0 bottom
JP36  JUMPER-SMT_2_NC_TRACE_SILK  [SMT-JUMPER_2_NC_TRACE_SILK]  52.63,91.03 0 bottom
JP37  STAND-OFF  [STAND-OFF]  9.4,80.01 0 top
JP38  STAND-OFF  [STAND-OFF]  55.12,80.01 0 top
JP39  STAND-OFF  [STAND-OFF]  55.12,138.43 0 top
JP40  STAND-OFF  [STAND-OFF]  9.4,138.43 0 top
JP41  FIDUCIAL1X2  [FIDUCIAL-1X2]  108.2,78.23 0 top
JP42  FIDUCIAL1X2  [FIDUCIAL-1X2]  58.93,140.21 0 top
JP43  FIDUCIAL1X2  [FIDUCIAL-1X2]  58.93,140.21 0 bottom
JP44  FIDUCIAL1X2  [FIDUCIAL-1X2]  108.2,78.23 0 bottom
JP45  JUMPER-SMT_3_1-NC_TRACE_SILK  [SMT-JUMPER_3_1-NC_TRACE_SILK]  72.26,130.43 0 bottom
JP46  JUMPER-SMT_2_NC_TRACE_SILK  [SMT-JUMPER_2_NC_TRACE_SILK]  103.94,91.03 0 bottom
JP47  STAND-OFF  [STAND-OFF]  60.71,80.01 0 top
JP48  STAND-OFF  [STAND-OFF]  106.43,80.01 0 top
JP49  STAND-OFF  [STAND-OFF]  106.43,138.43 0 top
JP50  STAND-OFF  [STAND-OFF]  60.71,138.43 0 top
JP51  FIDUCIAL1X2  [FIDUCIAL-1X2]  159.51,78.23 0 top
JP52  FIDUCIAL1X2  [FIDUCIAL-1X2]  110.24,140.21 0 top
JP53  FIDUCIAL1X2  [FIDUCIAL-1X2]  110.24,140.21 0 bottom
JP54  FIDUCIAL1X2  [FIDUCIAL-1X2]  159.51,78.23 0 bottom
JP55  JUMPER-SMT_3_1-NC_TRACE_SILK  [SMT-JUMPER_3_1-NC_TRACE_SILK]  123.57,130.43 0 bottom
JP56  JUMPER-SMT_2_NC_TRACE_SILK  [SMT-JUMPER_2_NC_TRACE_SILK]  155.24,91.03 0 bottom
JP57  STAND-OFF  [STAND-OFF]  112.01,80.01 0 top
JP58  STAND-OFF  [STAND-OFF]  157.73,80.01 0 top
JP59  STAND-OFF  [STAND-OFF]  157.73,138.43 0 top
JP60  STAND-OFF  [STAND-OFF]  112.01,138.43 0 top
L1  2.2uH  [0806]  48.26,58.17 270 top
L2  2.2uH  [0806]  99.57,58.17 270 top
L3  2.2uH  [0806]  150.88,58.17 270 top
L4  2.2uH  [0806]  48.26,125.48 270 top
L5  2.2uH  [0806]  99.57,125.48 270 top
L6  2.2uH  [0806]  150.88,125.48 270 top
LOGO1  OSHW-LOGOMINI  [OSHW-LOGO-MINI]  83.44,17.14 0 bottom
LOGO2  OSHW-LOGOMINI  [OSHW-LOGO-MINI]  134.75,17.14 0 bottom
LOGO3  OSHW-LOGOMINI  [OSHW-LOGO-MINI]  32.13,84.45 0 bottom
LOGO4  OSHW-LOGOMINI  [OSHW-LOGO-MINI]  32.13,17.14 0 bottom
LOGO5  OSHW-LOGOMINI  [OSHW-LOGO-MINI]  83.44,84.45 0 bottom
LOGO6  OSHW-LOGOMINI  [OSHW-LOGO-MINI]  134.75,84.45 0 bottom
MEAS  JUMPER-SMT_2_NC_TRACE_SILK  [SMT-JUMPER_2_NC_TRACE_SILK]  10.67,21.59 90 bottom
MEAS1  JUMPER-SMT_2_NC_TRACE_SILK  [SMT-JUMPER_2_NC_TRACE_SILK]  61.98,21.59 90 bottom
MEAS2  JUMPER-SMT_2_NC_TRACE_SILK  [SMT-JUMPER_2_NC_TRACE_SILK]  113.28,21.59 90 bottom
MEAS3  JUMPER-SMT_2_NC_TRACE_SILK  [SMT-JUMPER_2_NC_TRACE_SILK]  10.67,88.9 90 bottom
MEAS4  JUMPER-SMT_2_NC_TRACE_SILK  [SMT-JUMPER_2_NC_TRACE_SILK]  61.98,88.9 90 bottom
MEAS5  JUMPER-SMT_2_NC_TRACE_SILK  [SMT-JUMPER_2_NC_TRACE_SILK]  113.28,88.9 90 bottom
Q1  DMG3414U-7  [SOT23-R]  36.32,59.44 270 top
Q2  DMG3415U-7  [SOT23-R]  47.93,54.23 0 top
Q3  DMG3415U-7  [SOT23-R]  43.18,47.12 90 top
Q4  600mA/40V  [SOT23-3]  44.2,43.18 0 top
Q5  DMG3414U-7  [SOT23-R]  87.63,59.44 270 top
Q6  DMG3415U-7  [SOT23-R]  99.24,54.23 0 top
Q7  DMG3415U-7  [SOT23-R]  94.49,47.12 90 top
Q8  600mA/40V  [SOT23-3]  95.5,43.18 0 top
Q9  DMG3414U-7  [SOT23-R]  138.94,59.44 270 top
Q10  DMG3415U-7  [SOT23-R]  150.55,54.23 0 top
Q11  DMG3415U-7  [SOT23-R]  145.8,47.12 90 top
Q12  600mA/40V  [SOT23-3]  146.81,43.18 0 top
Q13  DMG3414U-7  [SOT23-R]  36.32,126.75 270 top
Q14  DMG3415U-7  [SOT23-R]  47.93,121.54 0 top
Q15  DMG3415U-7  [SOT23-R]  43.18,114.43 90 top
Q16  600mA/40V  [SOT23-3]  44.2,110.49 0 top
Q17  DMG3414U-7  [SOT23-R]  87.63,126.75 270 top
Q18  DMG3415U-7  [SOT23-R]  99.24,121.54 0 top
Q19  DMG3415U-7  [SOT23-R]  94.49,114.43 90 top
Q20  600mA/40V  [SOT23-3]  95.5,110.49 0 top
Q21  DMG3414U-7  [SOT23-R]  138.94,126.75 270 top
Q22  DMG3415U-7  [SOT23-R]  150.55,121.54 0 top
Q23  DMG3415U-7  [SOT23-R]  145.8,114.43 90 top
Q24  600mA/40V  [SOT23-3]  146.81,110.49 0 top
QWIIC  QWIIC_RIGHT_ANGLE  [JST04_1MM_RA]  48.13,15.37 0 top
QWIIC1  QWIIC_RIGHT_ANGLE  [JST04_1MM_RA]  99.44,15.37 0 top
QWIIC2  QWIIC_RIGHT_ANGLE  [JST04_1MM_RA]  150.75,15.37 0 top
QWIIC3  QWIIC_RIGHT_ANGLE  [JST04_1MM_RA]  48.13,82.68 0 top
QWIIC4  QWIIC_RIGHT_ANGLE  [JST04_1MM_RA]  99.44,82.68 0 top
QWIIC5  QWIIC_RIGHT_ANGLE  [JST04_1MM_RA]  150.75,82.68 0 top
R1  1k  [0603]  49.96,23.72 180 top
R2  1k  [0603]  14.73,22.99 90 top
R3  1k  [0603]  16.38,22.99 90 top
R4  5.1k  [0603]  20.32,18.92 180 top
R5  10k  [0603]  13.87,63.45 90 top
R6  12k  [0603]  20.07,59.94 90 top
R7  30.1k  [0603]  21.97,59.94 270 top
R8  100k  [0603]  16.69,62.41 0 top
R9  0.012R  [0603]  39.75,60.33 90 top
R10  100  [0603]  43.18,56.01 270 top
R11  100  [0603]  41.27,52.45 270 top
R12  1k  [0603]  49.96,26.26 180 top
R13  2.2k  [0603]  49.96,28.8 180 top
R14  10k  [0603]  38.1,53.21 0 top
R15  62KOHM-0603-1/10W-5%  [0603]  43.43,21.72 180 top
R16  1k  [0603]  49.96,21.18 180 top
R17  10k  [0603]  48.03,51.18 0 top
R18  1k  [0603]  101.27,23.72 180 top
R19  10k  [0603]  65.18,63.45 90 top
R20  5.1k  [0603]  15.49,18.92 0 top
R21  1k  [0603]  49.96,18.64 180 top
R22  10k  [0603]  46.1,47.12 90 top
R23  10k  [0603]  40.39,42.55 270 top
R24  20k  [0603]  40.39,46.23 270 top
R25  1k  [0603]  42.04,39.88 0 top
R26  100k  [0603]  10.67,40 90 top
R27  220k  [0603]  17.65,40 270 top
R28  2.0k  [0603]  33.53,23.88 180 top
R29  1k  [0603]  24.51,22.86 180 top
R30  10k  [0603]  45.47,39.88 0 top
R31  100  [0603]  94.49,56.01 270 top
R32  0.012R  [0603]  91.06,60.33 90 top
R33  100  [0603]  92.58,52.45 270 top
R34  12k  [0603]  71.37,59.94 90 top
R35  30.1k  [0603]  73.28,59.94 270 top
R36  100k  [0603]  68,62.41 0 top
R37  1k  [0603]  101.27,26.26 180 top
R38  2.2k  [0603]  101.27,28.8 180 top
R39  10k  [0603]  89.41,53.21 0 top
R40  62KOHM-0603-1/10W-5%  [0603]  94.74,21.72 180 top
R41  10k  [0603]  99.34,51.18 0 top
R42  1k  [0603]  101.27,21.18 180 top
R43  1k  [0603]  101.27,18.64 180 top
R44  100k  [0603]  61.98,40 90 top
R45  220k  [0603]  68.96,40 270 top
R46  2.0k  [0603]  84.84,23.88 180 top
R47  1k  [0603]  75.82,22.86 180 top
R48  1k  [0603]  66.04,22.99 90 top
R49  1k  [0603]  67.69,22.99 90 top
R50  5.1k  [0603]  71.63,18.92 180 top
R51  5.1k  [0603]  66.8,18.92 0 top
R52  10k  [0603]  97.41,47.12 90 top
R53  10k  [0603]  91.69,42.55 270 top
R54  20k  [0603]  91.69,46.23 270 top
R55  1k  [0603]  93.34,39.88 0 top
R56  10k  [0603]  96.77,39.88 0 top
R57  1k  [0603]  152.58,23.72 180 top
R58  10k  [0603]  116.48,63.45 90 top
R59  100  [0603]  145.8,56.01 270 top
R60  0.012R  [0603]  142.37,60.33 90 top
R61  100  [0603]  143.89,52.45 270 top
R62  12k  [0603]  122.68,59.94 90 top
R63  30.1k  [0603]  124.59,59.94 270 top
R64  100k  [0603]  119.3,62.41 0 top
R65  1k  [0603]  152.58,26.26 180 top
R66  2.2k  [0603]  152.58,28.8 180 top
R67  10k  [0603]  140.72,53.21 0 top
R68  62KOHM-0603-1/10W-5%  [0603]  146.05,21.72 180 top
R69  10k  [0603]  150.65,51.18 0 top
R70  1k  [0603]  152.58,21.18 180 top
R71  1k  [0603]  152.58,18.64 180 top
R72  100k  [0603]  113.28,40 90 top
R73  220k  [0603]  120.27,40 270 top
R74  2.0k  [0603]  136.14,23.88 180 top
R75  1k  [0603]  127.13,22.86 180 top
R76  1k  [0603]  117.35,22.99 90 top
R77  1k  [0603]  119,22.99 90 top
R78  5.1k  [0603]  122.94,18.92 180 top
R79  5.1k  [0603]  118.11,18.92 0 top
R80  10k  [0603]  148.72,47.12 90 top
R81  10k  [0603]  143,42.55 270 top
R82  20k  [0603]  143,46.23 270 top
R83  1k  [0603]  144.65,39.88 0 top
R84  10k  [0603]  148.08,39.88 0 top
R85  1k  [0603]  49.96,91.03 180 top
R86  10k  [0603]  13.87,130.76 90 top
R87  100  [0603]  43.18,123.32 270 top
R88  0.012R  [0603]  39.75,127.63 90 top
R89  100  [0603]  41.27,119.76 270 top
R90  12k  [0603]  20.07,127.25 90 top
R91  30.1k  [0603]  21.97,127.25 270 top
R92  100k  [0603]  16.69,129.72 0 top
R93  1k  [0603]  49.96,93.57 180 top
R94  2.2k  [0603]  49.96,96.11 180 top
R95  10k  [0603]  38.1,120.52 0 top
R96  62KOHM-0603-1/10W-5%  [0603]  43.43,89.03 180 top
R97  10k  [0603]  48.03,118.49 0 top
R98  1k  [0603]  49.96,88.49 180 top
R99  1k  [0603]  49.96,85.95 180 top
R100  100k  [0603]  10.67,107.31 90 top
R101  220k  [0603]  17.65,107.31 270 top
R102  2.0k  [0603]  33.53,91.19 180 top
R103  1k  [0603]  24.51,90.17 180 top
R104  1k  [0603]  14.73,90.3 90 top
R105  1k  [0603]  16.38,90.3 90 top
R106  5.1k  [0603]  20.32,86.23 180 top
R107  5.1k  [0603]  15.49,86.23 0 top
R108  10k  [0603]  46.1,114.43 90 top
R109  10k  [0603]  40.39,109.85 270 top
R110  20k  [0603]  40.39,113.54 270 top
R111  1k  [0603]  42.04,107.19 0 top
R112  10k  [0603]  45.47,107.19 0 top
R113  1k  [0603]  101.27,91.03 180 top
R114  10k  [0603]  65.18,130.76 90 top
R115  100  [0603]  94.49,123.32 270 top
R116  0.012R  [0603]  91.06,127.63 90 top
R117  100  [0603]  92.58,119.76 270 top
R118  12k  [0603]  71.37,127.25 90 top
R119  30.1k  [0603]  73.28,127.25 270 top
R120  100k  [0603]  68,129.72 0 top
R121  1k  [0603]  101.27,93.57 180 top
R122  2.2k  [0603]  101.27,96.11 180 top
R123  10k  [0603]  89.41,120.52 0 top
R124  62KOHM-0603-1/10W-5%  [0603]  94.74,89.03 180 top
R125  10k  [0603]  99.34,118.49 0 top
R126  1k  [0603]  101.27,88.49 180 top
R127  1k  [0603]  101.27,85.95 180 top
R128  100k  [0603]  61.98,107.31 90 top
R129  220k  [0603]  68.96,107.31 270 top
R130  2.0k  [0603]  84.84,91.19 180 top
R131  1k  [0603]  75.82,90.17 180 top
R132  1k  [0603]  66.04,90.3 90 top
R133  1k  [0603]  67.69,90.3 90 top
R134  5.1k  [0603]  71.63,86.23 180 top
R135  5.1k  [0603]  66.8,86.23 0 top
R136  10k  [0603]  97.41,114.43 90 top
R137  10k  [0603]  91.69,109.85 270 top
R138  20k  [0603]  91.69,113.54 270 top
R139  1k  [0603]  93.34,107.19 0 top
R140  10k  [0603]  96.77,107.19 0 top
R141  1k  [0603]  152.58,91.03 180 top
R142  10k  [0603]  116.48,130.76 90 top
R143  100  [0603]  145.8,123.32 270 top
R144  0.012R  [0603]  142.37,127.63 90 top
R145  100  [0603]  143.89,119.76 270 top
R146  12k  [0603]  122.68,127.25 90 top
R147  30.1k  [0603]  124.59,127.25 270 top
R148  100k  [0603]  119.3,129.72 0 top
R149  1k  [0603]  152.58,93.57 180 top
R150  2.2k  [0603]  152.58,96.11 180 top
R151  10k  [0603]  140.72,120.52 0 top
R152  62KOHM-0603-1/10W-5%  [0603]  146.05,89.03 180 top
R153  10k  [0603]  150.65,118.49 0 top
R154  1k  [0603]  152.58,88.49 180 top
R155  1k  [0603]  152.58,85.95 180 top
R156  100k  [0603]  113.28,107.31 90 top
R157  220k  [0603]  120.27,107.31 270 top
R158  2.0k  [0603]  136.14,91.19 180 top
R159  1k  [0603]  127.13,90.17 180 top
R160  1k  [0603]  117.35,90.3 90 top
R161  1k  [0603]  119,90.3 90 top
R162  5.1k  [0603]  122.94,86.23 180 top
R163  5.1k  [0603]  118.11,86.23 0 top
R164  10k  [0603]  148.72,114.43 90 top
R165  10k  [0603]  143,109.85 270 top
R166  20k  [0603]  143,113.54 270 top
R167  1k  [0603]  144.65,107.19 0 top
R168  10k  [0603]  148.08,107.19 0 top
RX0  TEST-POINT3X5  [PAD.03X.05]  17.02,25.4 0 bottom
RX1  TEST-POINT3X5  [PAD.03X.05]  27.18,55.88 0 bottom
RX2  TEST-POINT3X5  [PAD.03X.05]  68.33,25.4 0 bottom
RX3  TEST-POINT3X5  [PAD.03X.05]  78.49,55.88 0 bottom
RX4  TEST-POINT3X5  [PAD.03X.05]  119.63,25.4 0 bottom
RX5  TEST-POINT3X5  [PAD.03X.05]  129.79,55.88 0 bottom
RX6  TEST-POINT3X5  [PAD.03X.05]  17.02,92.71 0 bottom
RX7  TEST-POINT3X5  [PAD.03X.05]  27.18,123.19 0 bottom
RX8  TEST-POINT3X5  [PAD.03X.05]  68.33,92.71 0 bottom
RX9  TEST-POINT3X5  [PAD.03X.05]  78.49,123.19 0 bottom
RX10  TEST-POINT3X5  [PAD.03X.05]  119.63,92.71 0 bottom
RX11  TEST-POINT3X5  [PAD.03X.05]  129.79,123.19 0 bottom
S1  RESET  [TACTILE_SWITCH_SMD_5.2MM]  10.92,35.18 0 top
S2  RESET  [TACTILE_SWITCH_SMD_5.2MM]  62.23,35.18 0 top
S3  RESET  [TACTILE_SWITCH_SMD_5.2MM]  113.54,35.18 0 top
S4  RESET  [TACTILE_SWITCH_SMD_5.2MM]  10.92,102.49 0 top
S5  RESET  [TACTILE_SWITCH_SMD_5.2MM]  62.23,102.49 0 top
S6  RESET  [TACTILE_SWITCH_SMD_5.2MM]  113.54,102.49 0 top
SAFEBOOT  TEST-POINT3X5  [PAD.03X.05]  50.04,60.96 0 bottom
SAFEBOOT1  TEST-POINT3X5  [PAD.03X.05]  101.35,60.96 0 bottom
SAFEBOOT2  TEST-POINT3X5  [PAD.03X.05]  152.65,60.96 0 bottom
SAFEBOOT3  TEST-POINT3X5  [PAD.03X.05]  50.04,128.27 0 bottom
SAFEBOOT4  TEST-POINT3X5  [PAD.03X.05]  101.35,128.27 0 bottom
SAFEBOOT5  TEST-POINT3X5  [PAD.03X.05]  152.65,128.27 0 bottom
SC1+  [1X01_NO_SILK]  39.75,63.75 0 top
SC1+1  [1X01_NO_SILK]  91.06,63.75 0 top
SC1+2  [1X01_NO_SILK]  142.37,63.75 0 top
SC1+3  [1X01_NO_SILK]  39.75,131.06 0 top
SC1+4  [1X01_NO_SILK]  91.06,131.06 0 top
SC1+5  [1X01_NO_SILK]  142.37,131.06 0 top
SC1-  [1X01_NO_SILK]  34.73,63.75 0 top
SC1-1  [1X01_NO_SILK]  86.04,63.75 0 top
SC1-2  [1X01_NO_SILK]  137.35,63.75 0 top
SC1-3  [1X01_NO_SILK]  34.73,131.06 0 top
SC1-4  [1X01_NO_SILK]  86.04,131.06 0 top
SC1-5  [1X01_NO_SILK]  137.35,131.06 0 top
SC2+  [1X01_NO_SILK]  29.78,63.75 0 top
SC2+1  [1X01_NO_SILK]  81.09,63.75 0 top
SC2+2  [1X01_NO_SILK]  132.4,63.75 0 top
SC2+3  [1X01_NO_SILK]  29.78,131.06 0 top
SC2+4  [1X01_NO_SILK]  81.09,131.06 0 top
SC2+5  [1X01_NO_SILK]  132.4,131.06 0 top
SC2-  [1X01_NO_SILK]  24.7,63.75 0 top
SC2-1  [1X01_NO_SILK]  76.01,63.75 0 top
SC2-2  [1X01_NO_SILK]  127.32,63.75 0 top
SC2-3  [1X01_NO_SILK]  24.7,131.06 0 top
SC2-4  [1X01_NO_SILK]  76.01,131.06 0 top
SC2-5  [1X01_NO_SILK]  127.32,131.06 0 top
SPARKX1  SPARKX-LOGO4  [SPARKX-MEDIUM]  10.06,62.86 90 top
SPARKX2  SPARKX-LOGO4  [SPARKX-MEDIUM]  32.26,27.81 0 bottom
SPARKX3  SPARKX-LOGO4  [SPARKX-MEDIUM]  83.57,27.81 0 bottom
SPARKX4  SPARKX-LOGO4  [SPARKX-MEDIUM]  61.37,62.86 90 top
SPARKX5  SPARKX-LOGO4  [SPARKX-MEDIUM]  134.87,27.81 0 bottom
SPARKX6  SPARKX-LOGO4  [SPARKX-MEDIUM]  112.67,62.86 90 top
SPARKX7  SPARKX-LOGO4  [SPARKX-MEDIUM]  32.26,95.12 0 bottom
SPARKX8  SPARKX-LOGO4  [SPARKX-MEDIUM]  10.06,130.18 90 top
SPARKX9  SPARKX-LOGO4  [SPARKX-MEDIUM]  83.57,95.12 0 bottom
SPARKX10  SPARKX-LOGO4  [SPARKX-MEDIUM]  61.37,130.18 90 top
SPARKX11  SPARKX-LOGO4  [SPARKX-MEDIUM]  134.87,95.12 0 bottom
SPARKX12  SPARKX-LOGO4  [SPARKX-MEDIUM]  112.67,130.18 90 top
SPI  [1X07_NO_SILK]  56.39,55.88 270 top
SPI1  [1X07_NO_SILK]  107.7,55.88 270 top
SPI2  [1X07_NO_SILK]  159,55.88 270 top
SPI3  [1X07_NO_SILK]  56.39,123.19 270 top
SPI4  [1X07_NO_SILK]  107.7,123.19 270 top
SPI5  [1X07_NO_SILK]  159,123.19 270 top
TX0  TEST-POINT3X5  [PAD.03X.05]  17.02,22.86 0 bottom
TX1  TEST-POINT3X5  [PAD.03X.05]  27.18,53.34 0 bottom
TX2  TEST-POINT3X5  [PAD.03X.05]  68.33,22.86 0 bottom
TX3  TEST-POINT3X5  [PAD.03X.05]  78.49,53.34 0 bottom
TX4  TEST-POINT3X5  [PAD.03X.05]  119.63,22.86 0 bottom
TX5  TEST-POINT3X5  [PAD.03X.05]  129.79,53.34 0 bottom
TX6  TEST-POINT3X5  [PAD.03X.05]  17.02,90.17 0 bottom
TX7  TEST-POINT3X5  [PAD.03X.05]  27.18,120.65 0 bottom
TX8  TEST-POINT3X5  [PAD.03X.05]  68.33,90.17 0 bottom
TX9  TEST-POINT3X5  [PAD.03X.05]  78.49,120.65 0 bottom
TX10  TEST-POINT3X5  [PAD.03X.05]  119.63,90.17 0 bottom
TX11  TEST-POINT3X5  [PAD.03X.05]  129.79,120.65 0 bottom
U1  CH340E_MSOP10  [MSOP10]  19.43,22.99 90 top
U2  LTC3225EDDB#TRMPBF  [DFN300X200-10L]  16.76,65.66 0 top
U3  ADM4210-1  [TSOT6]  39.75,56.64 270 top
U4  UBLOX_ZOE_M8-0-10  [UBLOX_ZOE_M8-0-10]  52.07,60.07 0 top
U5  AS179-92LF  [SOT65P220X100-6N]  48.01,65.15 90 top
U6  MS8607-02BA01  [MS8607-02BA01]  15.37,50.8 180 top
U7  ARTEMIS_MODULESMD  [ARTEMIS_FP]  32.26,34.29 270 top
U8  V_SUPERVISORBD48K24G-TL  [SSOP3]  20.83,41.4 0 top
U9  MCP73831  [SOT23-5]  29.34,22.86 270 top
U10  3.3V  [SOT23-5]  12.19,43.81 270 top
U11  LTC3225EDDB#TRMPBF  [DFN300X200-10L]  68.07,65.66 0 top
U12  ADM4210-1  [TSOT6]  91.06,56.64 270 top
U13  UBLOX_ZOE_M8-0-10  [UBLOX_ZOE_M8-0-10]  103.38,60.07 0 top
U14  AS179-92LF  [SOT65P220X100-6N]  99.31,65.15 90 top
U15  MS8607-02BA01  [MS8607-02BA01]  66.67,50.8 180 top
U16  ARTEMIS_MODULESMD  [ARTEMIS_FP]  83.57,34.29 270 top
U17  MCP73831  [SOT23-5]  80.65,22.86 270 top
U18  CH340E_MSOP10  [MSOP10]  70.74,22.99 90 top
U19  3.3V  [SOT23-5]  63.5,43.81 270 top
U20  V_SUPERVISORBD48K24G-TL  [SSOP3]  72.14,41.4 0 top
U21  LTC3225EDDB#TRMPBF  [DFN300X200-10L]  119.38,65.66 0 top
U22  ADM4210-1  [TSOT6]  142.37,56.64 270 top
U23  UBLOX_ZOE_M8-0-10  [UBLOX_ZOE_M8-0-10]  154.69,60.07 0 top
U24  AS179-92LF  [SOT65P220X100-6N]  150.62,65.15 90 top
U25  MS8607-02BA01  [MS8607-02BA01]  117.98,50.8 180 top
U26  ARTEMIS_MODULESMD  [ARTEMIS_FP]  134.87,34.29 270 top
U27  MCP73831  [SOT23-5]  131.95,22.86 270 top
U28  CH340E_MSOP10  [MSOP10]  122.05,22.99 90 top
U29  3.3V  [SOT23-5]  114.81,43.81 270 top
U30  V_SUPERVISORBD48K24G-TL  [SSOP3]  123.44,41.4 0 top
U31  LTC3225EDDB#TRMPBF  [DFN300X200-10L]  16.76,132.97 0 top
U32  ADM4210-1  [TSOT6]  39.75,123.95 270 top
U33  UBLOX_ZOE_M8-0-10  [UBLOX_ZOE_M8-0-10]  52.07,127.38 0 top
U34  AS179-92LF  [SOT65P220X100-6N]  48.01,132.46 90 top
U35  MS8607-02BA01  [MS8607-02BA01]  15.37,118.11 180 top
U36  ARTEMIS_MODULESMD  [ARTEMIS_FP]  32.26,101.6 270 top
U37  MCP73831  [SOT23-5]  29.34,90.17 270 top
U38  CH340E_MSOP10  [MSOP10]  19.43,90.3 90 top
U39  3.3V  [SOT23-5]  12.19,111.12 270 top
U40  V_SUPERVISORBD48K24G-TL  [SSOP3]  20.83,108.71 0 top
U41  LTC3225EDDB#TRMPBF  [DFN300X200-10L]  68.07,132.97 0 top
U42  ADM4210-1  [TSOT6]  91.06,123.95 270 top
U43  UBLOX_ZOE_M8-0-10  [UBLOX_ZOE_M8-0-10]  103.38,127.38 0 top
U44  AS179-92LF  [SOT65P220X100-6N]  99.31,132.46 90 top
U45  MS8607-02BA01  [MS8607-02BA01]  66.67,118.11 180 top
U46  ARTEMIS_MODULESMD  [ARTEMIS_FP]  83.57,101.6 270 top
U47  MCP73831  [SOT23-5]  80.65,90.17 270 top
U48  CH340E_MSOP10  [MSOP10]  70.74,90.3 90 top
U49  3.3V  [SOT23-5]  63.5,111.12 270 top
U50  V_SUPERVISORBD48K24G-TL  [SSOP3]  72.14,108.71 0 top
U51  LTC3225EDDB#TRMPBF  [DFN300X200-10L]  119.38,132.97 0 top
U52  ADM4210-1  [TSOT6]  142.37,123.95 270 top
U53  UBLOX_ZOE_M8-0-10  [UBLOX_ZOE_M8-0-10]  154.69,127.38 0 top
U54  AS179-92LF  [SOT65P220X100-6N]  150.62,132.46 90 top
U55  MS8607-02BA01  [MS8607-02BA01]  117.98,118.11 180 top
U56  ARTEMIS_MODULESMD  [ARTEMIS_FP]  134.87,101.6 270 top
U57  MCP73831  [SOT23-5]  131.95,90.17 270 top
U58  CH340E_MSOP10  [MSOP10]  122.05,90.3 90 top
U59  3.3V  [SOT23-5]  114.81,111.12 270 top
U60  V_SUPERVISORBD48K24G-TL  [SSOP3]  123.44,108.71 0 top
U$1  [60MA0]  21.97,64.52 90 bottom
U$2  [POWER0]  51.87,24.99 0 top
U$3  [GND1]  13.64,55.88 0 bottom
U$4  [3#3V2]  13.61,53.34 0 bottom
U$5  [SCL0]  13.21,48.26 0 bottom
U$6  [SDA0]  13.34,50.8 0 bottom
U$7  [EN0]  8.76,25.4 0 top
U$8  [3#3V2]  59.94,53.34 0 top
U$9  [CHARGING0]  50.22,27.53 0 top
U$10  [9603N_POWER0]  48.31,30.33 0 top
U$11  [QWIIC_4MM]  48.13,17.02 0 top
U$12  [GND1]  55.7,55.88 0 bottom
U$13  [150MA0]  19.94,64.52 90 bottom
U$14  [CHARGE0]  18.29,64.26 90 bottom
U$15  [CURRENT0]  17.02,64.14 90 bottom
U$16  [TX00]  16.38,28.32 90 top
U$17  [GND1]  56.39,61.47 270 top
U$18  [SCK0]  51.18,48.26 0 top
U$19  [GNSS0]  53.09,22.48 0 top
U$20  [3#3V2]  55.63,40.64 0 bottom
U$21  [3#3V2]  8.64,53.34 0 top
U$22  [GND1]  8.76,55.88 0 top
U$23  [RX00]  14.73,28.19 90 top
U$24  [3#3V2]  50.55,40.64 0 top
U$25  [QWIIC_5MM]  48.13,11.56 0 bottom
U$26  [SCL9]  8.76,48.26 0 top
U$27  [SDA8]  8.64,50.8 0 top
U$28  [GND1]  60.07,55.88 0 top
U$29  [SOLAR0]  37.21,20.83 0 top
U$30  [SCL9]  60.07,48.26 0 top
U$31  [SCK0]  55.75,48.26 0 bottom
U$32  [5#3V0]  34.8,52.83 90 bottom
U$33  [RX0]  49.28,55.88 0 bottom
U$34  [RX00]  21.34,25.4 0 bottom
U$35  [RX10]  26.42,55.88 0 bottom
U$36  [SAFEBOOT0]  54.74,62.61 0 bottom
U$37  [TX0]  49.28,53.34 0 bottom
U$38  [TX00]  21.46,22.86 0 bottom
U$39  [TX10]  26.54,53.34 0 bottom
U$40  [ARTEMIS0]  37.34,24.77 0 bottom
U$41  [GLOBAL0]  36.96,22.35 0 bottom
U$42  [TRACKER0]  37.46,19.94 0 bottom
U$43  [PWR_LED0]  57.28,25.91 0 bottom
U$44  [VBUS0]  8.76,20.32 0 top
U$45  [LIPO0]  27.3,20.83 0 top
U$46  [LIPO0]  26.16,25.02 0 top
U$47  [3#3V_EN0]  11.43,25.65 90 bottom
U$48  [MEAS0]  11.43,14.48 90 bottom
U$49  [RESET0]  15.37,32.77 90 top
U$50  [D190]  53.59,19.94 0 top
U$51  [SDA8]  59.94,50.8 0 top
U$52  [GND1]  64.95,55.88 0 bottom
U$53  [USB#C0]  20.7,11.56 0 bottom
U$54  [3#3V2]  64.92,53.34 0 bottom
U$55  [POWER0]  103.17,24.99 0 top
U$56  [USB#C0]  15.24,17.65 0 top
U$57  [LIPO0]  31.37,11.56 0 bottom
U$58  [#RST0]  8.64,30.48 0 top
U$59  [GND0]  8.76,27.94 0 top
U$60  [VIN0]  8.76,22.86 0 top
U$61  [3_X_AA0]  42.42,15.37 0 bottom
U$62  [3_X_AAA0]  43.05,13.46 0 bottom
U$63  [6V_MAX0]  42.8,11.56 0 bottom
U$64  [SOLAR0]  41.91,17.27 0 bottom
U$65  [VIN#30]  41.02,45.21 90 bottom
U$66  [CHARGING0]  101.52,27.53 0 top
U$67  [D350]  55.75,45.72 0 bottom
U$68  [D350]  51.31,45.72 0 top
U$69  [MISO0]  55.75,50.8 0 bottom
U$70  [MISO0]  50.42,50.8 0 top
U$71  [MOSI0]  50.42,53.34 0 top
U$72  [MOSI0]  55.75,53.34 0 bottom
U$73  [D40]  52.07,43.18 0 top
U$74  [D40]  55.75,43.18 0 bottom
U$75  [9603N_POWER0]  99.62,30.33 0 top
U$76  [60MA0]  73.28,64.52 90 bottom
U$77  [150MA0]  71.25,64.52 90 bottom
U$78  [CHARGE0]  69.6,64.26 90 bottom
U$79  [CURRENT0]  68.33,64.14 90 bottom
U$80  [GND1]  107.01,55.88 0 bottom
U$81  [GND1]  107.7,61.47 270 top
U$82  [3#3V2]  106.93,40.64 0 bottom
U$83  [3#3V2]  101.85,40.64 0 top
U$84  [SCL0]  64.52,48.26 0 bottom
U$85  [SDA0]  64.64,50.8 0 bottom
U$86  [SCK0]  102.49,48.26 0 top
U$87  [SCK0]  107.06,48.26 0 bottom
U$88  [GNSS0]  104.39,22.48 0 top
U$89  [5#3V0]  86.11,52.83 90 bottom
U$90  [RX0]  100.58,55.88 0 bottom
U$91  [RX00]  72.64,25.4 0 bottom
U$92  [RX10]  77.72,55.88 0 bottom
U$93  [SAFEBOOT0]  106.05,62.61 0 bottom
U$94  [TX0]  100.58,53.34 0 bottom
U$95  [TX00]  72.77,22.86 0 bottom
U$96  [TX10]  77.85,53.34 0 bottom
U$97  [ARTEMIS0]  88.65,24.77 0 bottom
U$98  [GLOBAL0]  88.27,22.35 0 bottom
U$99  [TRACKER0]  88.77,19.94 0 bottom
U$100  [PWR_LED0]  108.59,25.91 0 bottom
U$101  [VBUS0]  60.07,20.32 0 top
U$102  [MEAS0]  62.74,14.48 90 bottom
U$103  [3#3V_EN0]  62.74,25.65 90 bottom
U$104  [D190]  104.9,19.94 0 top
U$105  [LIPO0]  82.68,11.56 0 bottom
U$106  [GND0]  60.07,27.94 0 top
U$107  [VIN0]  60.07,22.86 0 top
U$108  [3_X_AA0]  93.73,15.37 0 bottom
U$109  [3_X_AAA0]  94.36,13.46 0 bottom
U$110  [6V_MAX0]  94.11,11.56 0 bottom
U$111  [SOLAR0]  93.22,17.27 0 bottom
U$112  [VIN#30]  92.33,45.21 90 bottom
U$113  [TX00]  67.69,28.32 90 top
U$114  [RX00]  66.04,28.19 90 top
U$115  [SOLAR0]  88.52,20.83 0 top
U$116  [LIPO0]  78.61,20.83 0 top
U$117  [LIPO0]  77.47,25.02 0 top
U$118  [RESET0]  66.67,32.77 90 top
U$119  [USB#C0]  72.01,11.56 0 bottom
U$120  [USB#C0]  66.55,17.65 0 top
U$121  [EN0]  60.07,25.4 0 top
U$122  [#RST0]  59.94,30.48 0 top
U$123  [D350]  107.06,45.72 0 bottom
U$124  [D350]  102.62,45.72 0 top
U$125  [MISO0]  107.06,50.8 0 bottom
U$126  [MISO0]  101.73,50.8 0 top
U$127  [MOSI0]  101.73,53.34 0 top
U$128  [MOSI0]  107.06,53.34 0 bottom
U$129  [D40]  103.38,43.18 0 top
U$130  [D40]  107.06,43.18 0 bottom
U$131  [QWIIC_4MM]  99.44,17.02 0 top
U$132  [QWIIC_5MM]  99.44,11.56 0 bottom
U$133  [3#3V2]  111.25,53.34 0 top
U$134  [GND1]  111.38,55.88 0 top
U$135  [SCL9]  111.38,48.26 0 top
U$136  [SDA8]  111.25,50.8 0 top
U$137  [GND1]  116.26,55.88 0 bottom
U$138  [3#3V2]  116.23,53.34 0 bottom
U$139  [POWER0]  154.48,24.99 0 top
U$140  [CHARGING0]  152.83,27.53 0 top
U$141  [9603N_POWER0]  150.93,30.33 0 top
U$142  [60MA0]  124.59,64.52 90 bottom
U$143  [150MA0]  122.56,64.52 90 bottom
U$144  [CHARGE0]  120.9,64.26 90 bottom
U$145  [CURRENT0]  119.63,64.14 90 bottom
U$146  [GND1]  158.32,55.88 0 bottom
U$147  [GND1]  159,61.47 270 top
U$148  [3#3V2]  158.24,40.64 0 bottom
U$149  [3#3V2]  153.16,40.64 0 top
U$150  [SCL0]  115.82,48.26 0 bottom
U$151  [SDA0]  115.95,50.8 0 bottom
U$152  [SCK0]  153.8,48.26 0 top
U$153  [SCK0]  158.37,48.26 0 bottom
U$154  [GNSS0]  155.7,22.48 0 top
U$155  [5#3V0]  137.41,52.83 90 bottom
U$156  [RX0]  151.89,55.88 0 bottom
U$157  [RX00]  123.95,25.4 0 bottom
U$158  [RX10]  129.03,55.88 0 bottom
U$159  [SAFEBOOT0]  157.35,62.61 0 bottom
U$160  [TX0]  151.89,53.34 0 bottom
U$161  [TX00]  124.08,22.86 0 bottom
U$162  [TX10]  129.16,53.34 0 bottom